# Altium PCB PCB Rev 2.PcbDoc
Units mil, origin at the board's own origin, x right, y up, seen from the top; angles counter-clockwise.
Board outline 1692.91 x 1736.22 mil, 4 copper layers (TOP SIGNAL, POWER, GND, BOTTOM SIGNAL), stack 23.756 mil thick; 62 components, 41 nets, 249 pads, 43 vias.
Unrouted connection lines stored in the file: 19.
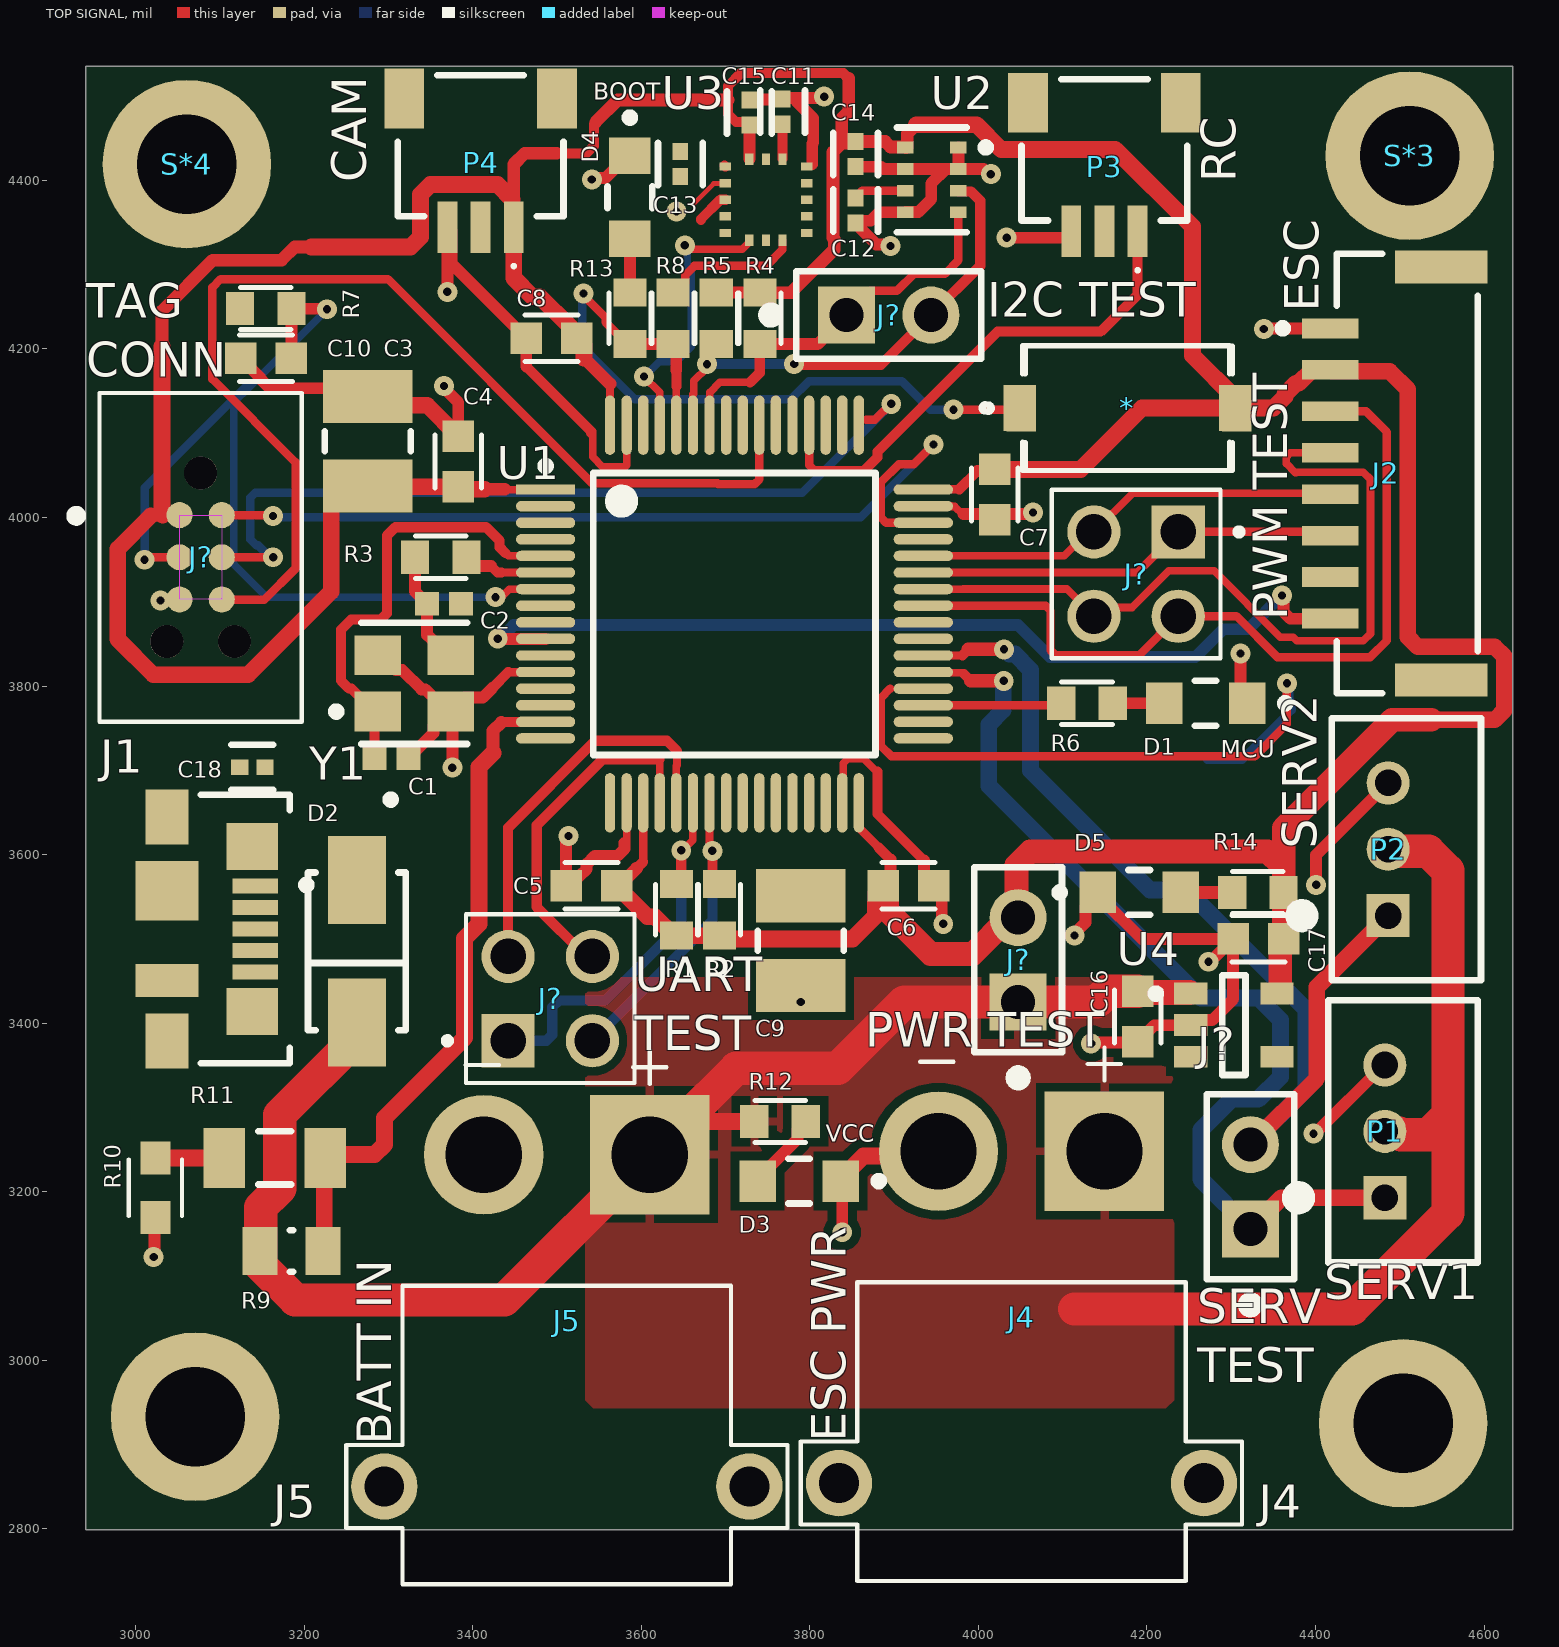
[diagram p0: TOP SIGNAL view]
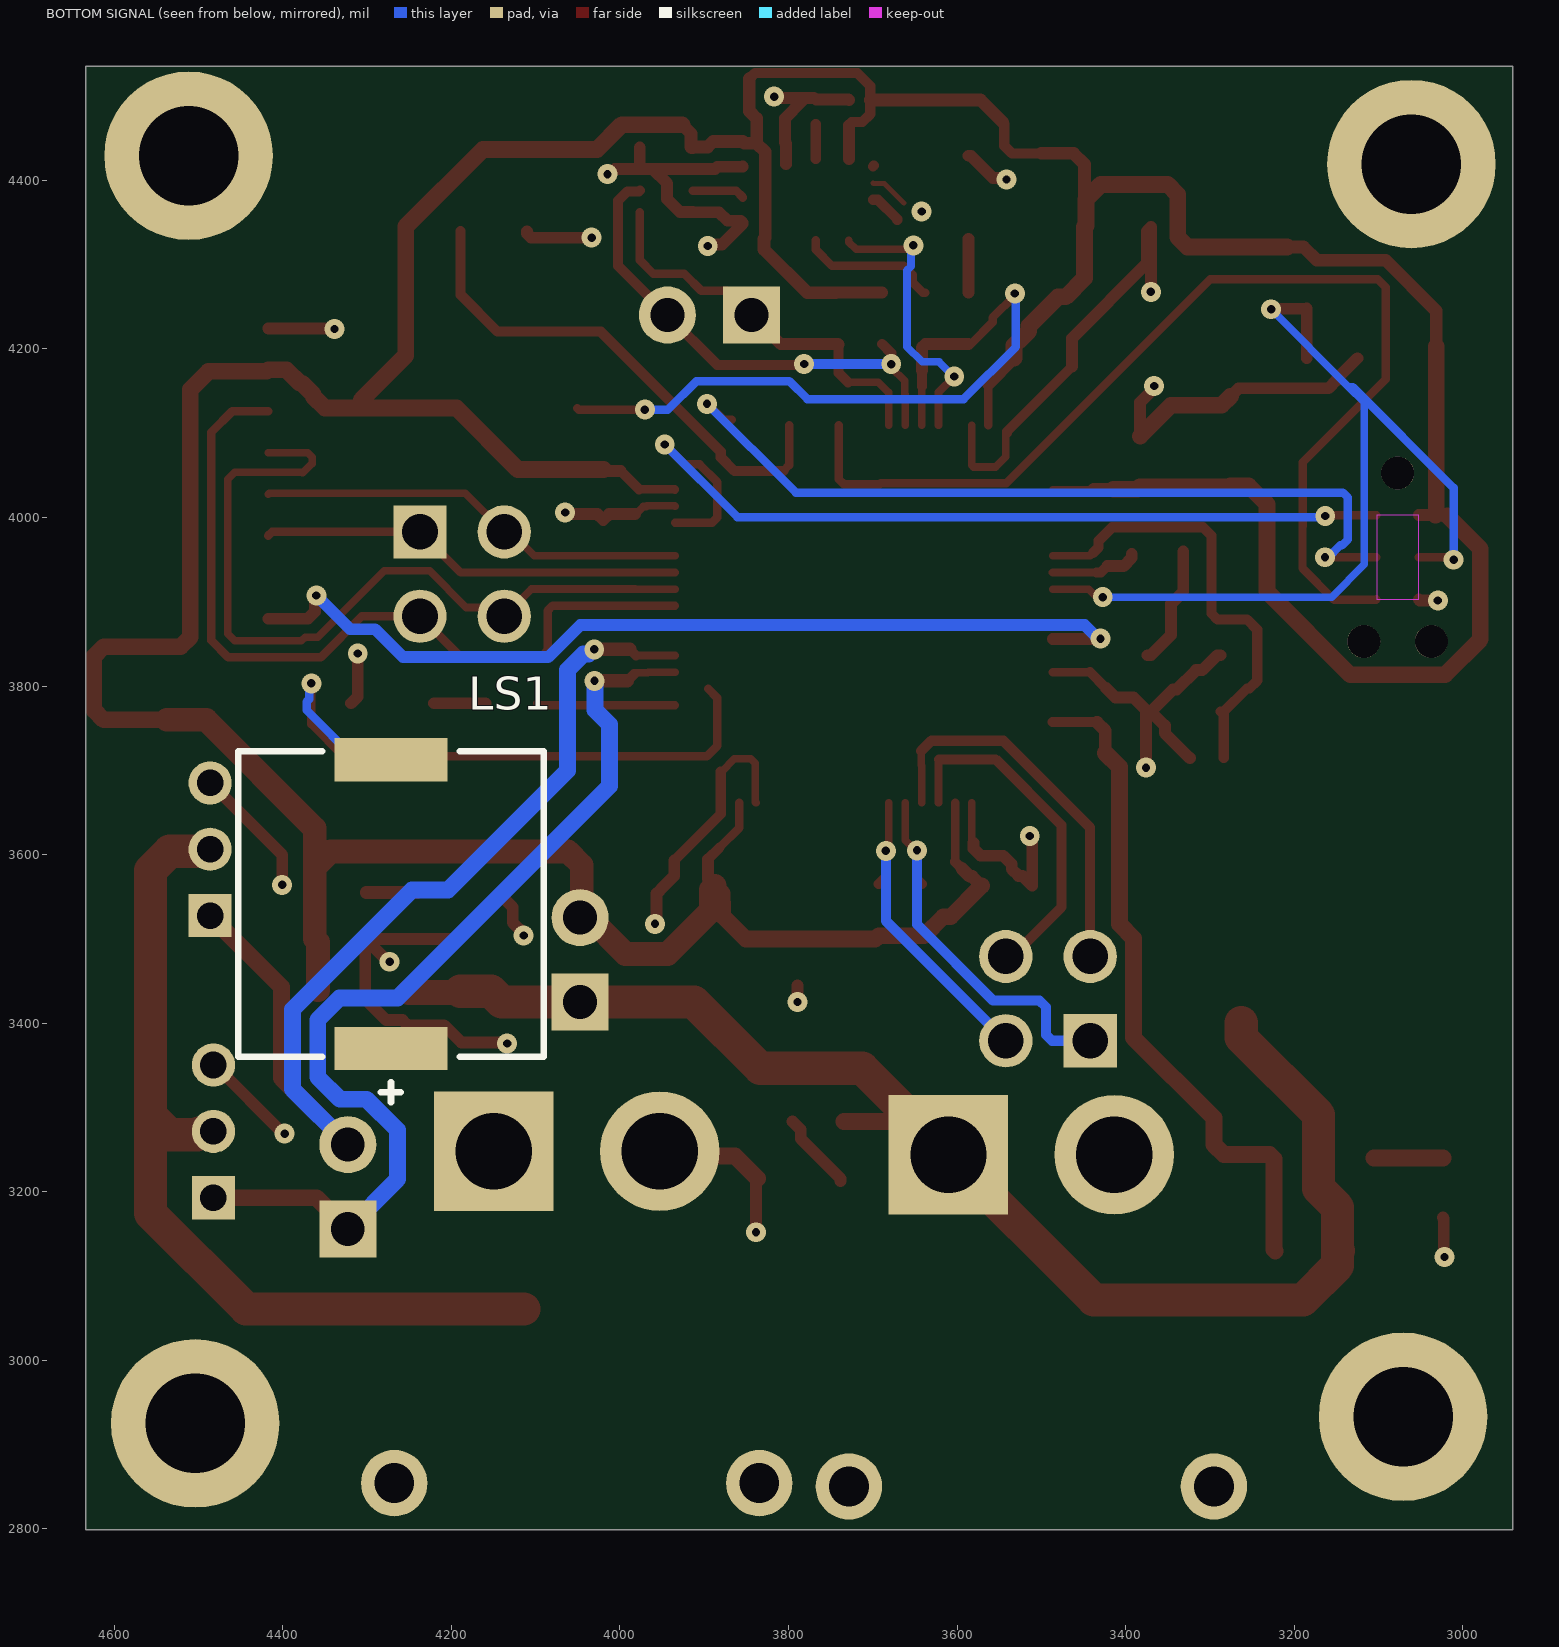
[diagram p1: BOTTOM SIGNAL view, seen from below]
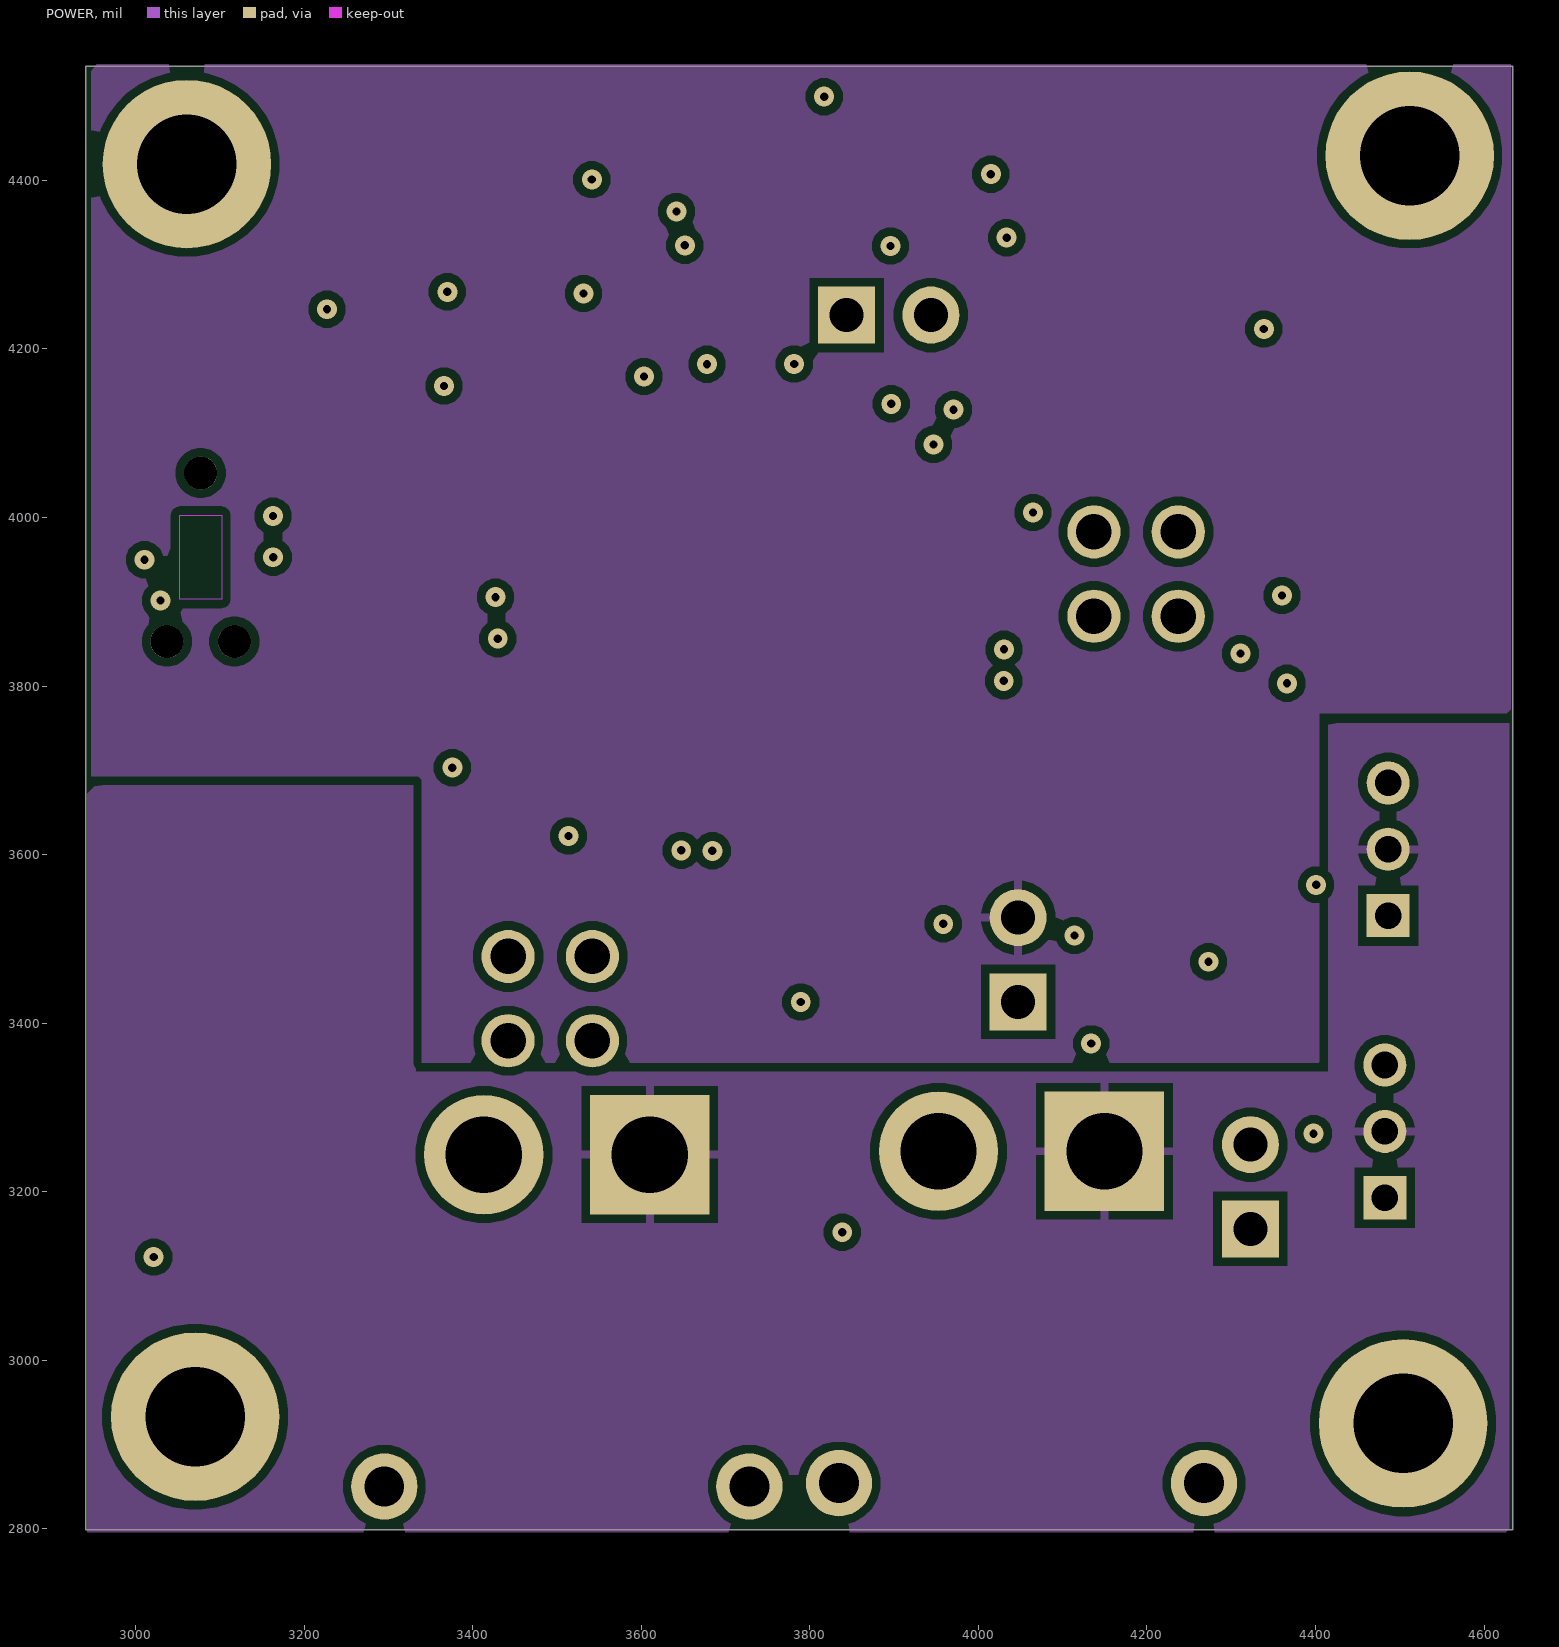
[diagram p2: POWER]
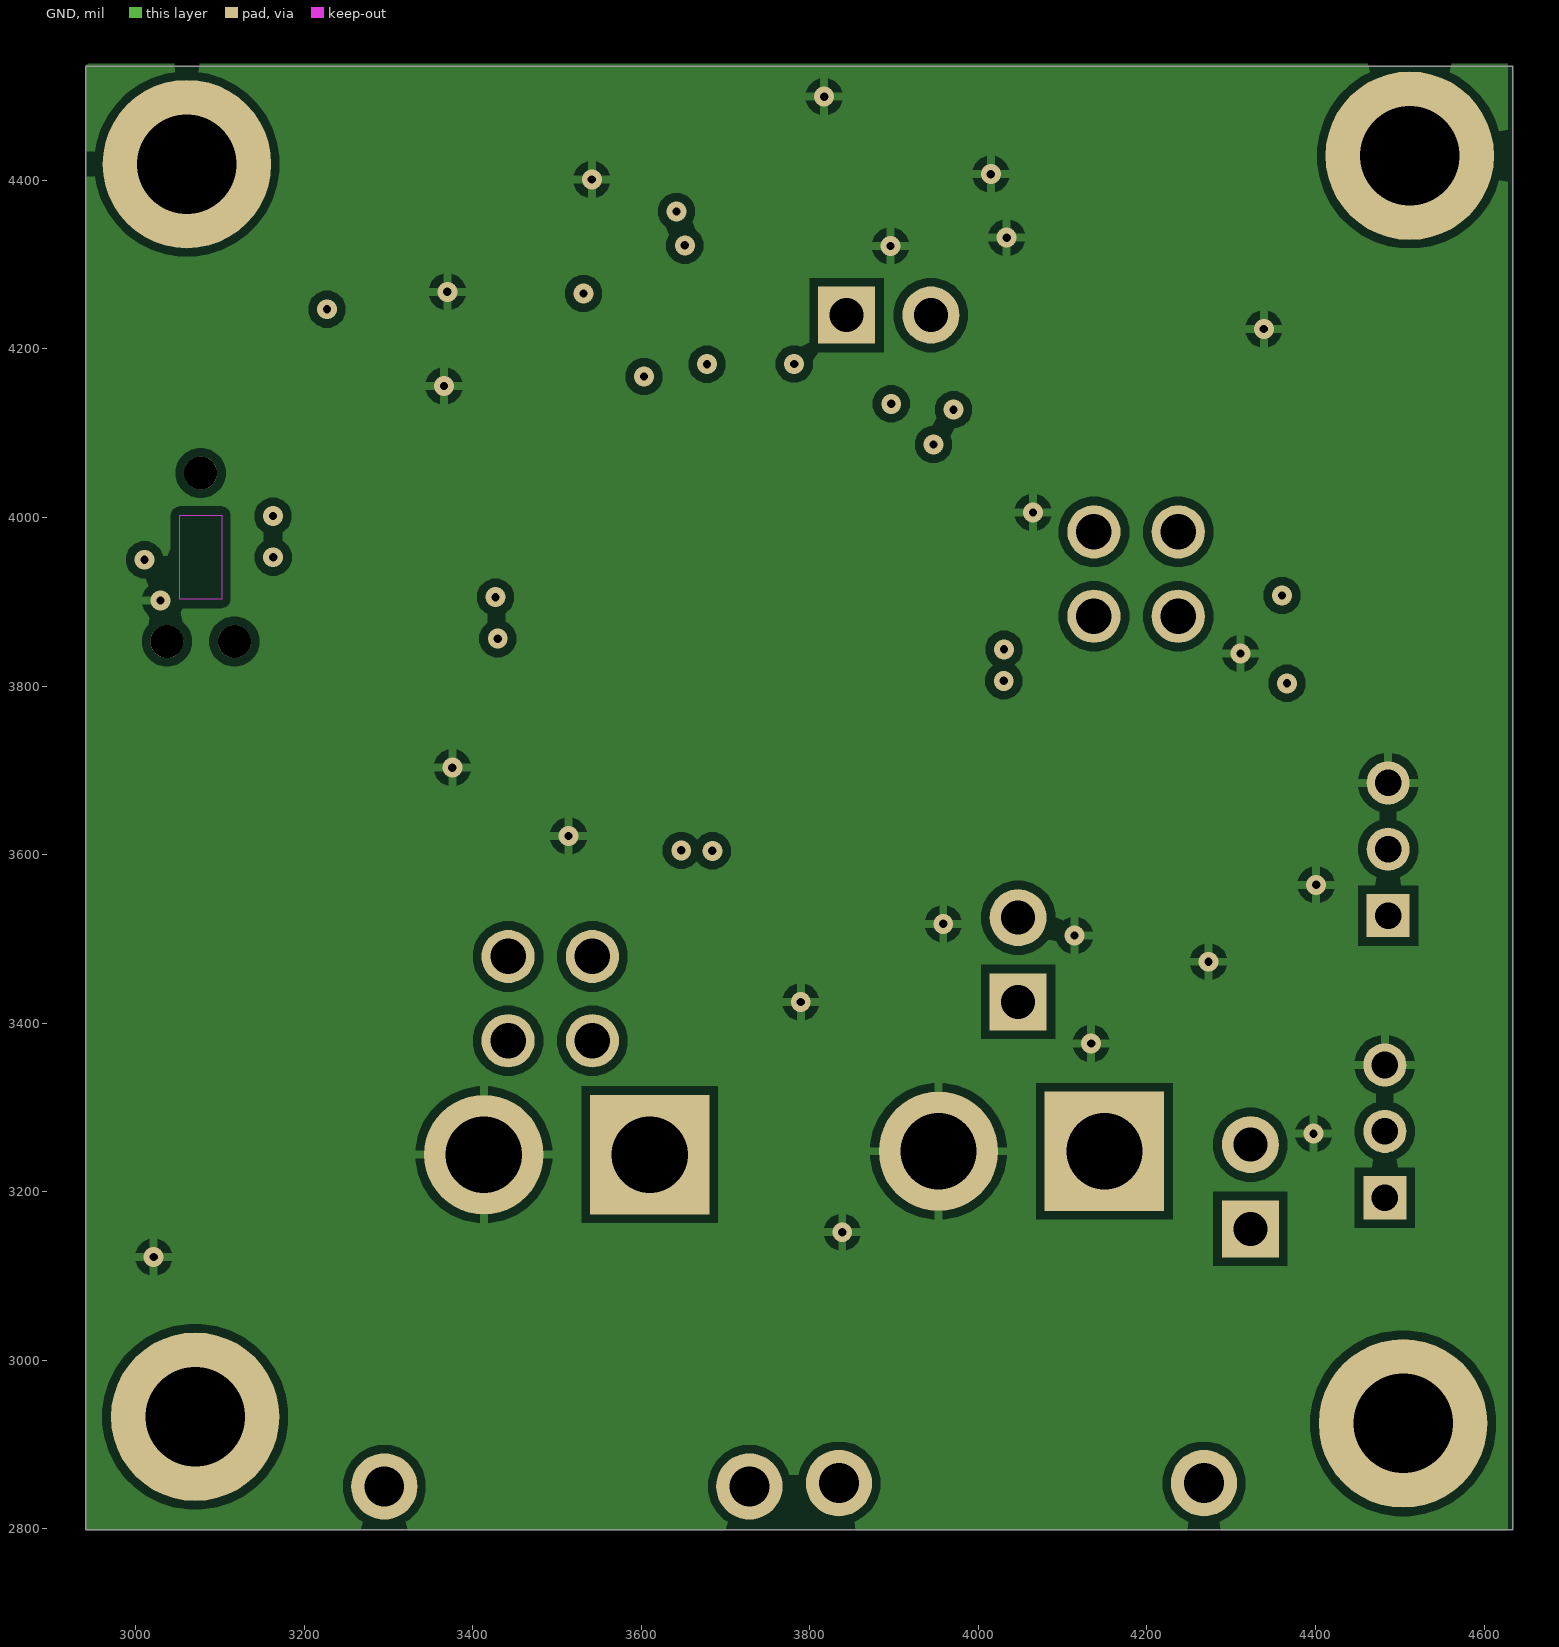
[diagram p3: GND]

## Layer stack, top to bottom
Top Solder: solder mask 0.4, Solder Resist, Dk 3.5
TOP SIGNAL: signal copper 1.4
Dielectric 2: prepreg 2.8, PP-006, Dk 4.1
POWER: signal copper 1.378
Dielectric 1: dielectric 12.6, FR-4, Dk 4.8
GND: signal copper 1.378
Dielectric 3: prepreg 2.8, PP-006, Dk 4.1
BOTTOM SIGNAL: signal copper 1.4
Bottom Solder: solder mask 0.4, Solder Resist, Dk 3.5

## Board outline
2940.94,4535.43 4633.86,4535.43 4633.86,2799.21 2940.94,2799.21

## Design rules (kind name [scope] priority, off if disabled: settings)
Clearance Clearance_1 [(ExistsOnLayer('POWER') Or ExistsOnLayer('GND')) vs (ExistsOnLayer('POWER') Or ExistsOnLayer('GND'))] p1: gap=10 ignorepadtopadclearanceinfootprint=FALSE sourcerule=37 cellrowname=All cellrowtype=0 cellcolname=All cellcoltype=0 innerlayers=TRUE
Clearance Clearance_2 [(ExistsOnLayer('TOP SIGNAL') Or ExistsOnLayer('BOTTOM SIGNAL')) vs (ExistsOnLayer('TOP SIGNAL') Or ExistsOnLayer('BOTTOM SIGNAL'))] p2: gap=10 ignorepadtopadclearanceinfootprint=FALSE sourcerule=37 cellrowname=All cellrowtype=0 cellcolname=All cellcoltype=0 outerlayers=TRUE
Clearance [All] p3: gap=10 ignorepadtopadclearanceinfootprint=FALSE ismatrix=TRUE
PolygonConnect [All] p1: connectstyle=Relief reliefconductorwidth=10 reliefentries=4 polygonreliefangle="90 Angle" airgapwidth=10
RoutingVias [All] p1: holewidth=28 width=50 viastyle="Through Hole" minholewidth=28 minwidth=50 maxholewidth=28 maxwidth=50
SolderMaskExpansion [All] p1: expansion=4 istentingtop=FALSE
Width MaxMinWidth_1 [All] p1: maxlimit=39.37 minlimit=10 preferedwidth=10 toplayer_minwidth=0 midlayer1_maxwidth=10 midlayer2_maxwidth=10 bottomlayer_minwidth=0 minimp=50.000000 maximp=50.000000 favimp=50.000000
Width [All] p2: maxlimit=10 minlimit=10 preferedwidth=10
30 further rules are at their usual default settings.

## Classes and differential pairs
component class Sensors: C11 C12 C13 C14 C15 U2 U3
component class Power: C16 C17 C18 D2 D3 D4 D5 J1 R9 R10 R11 R12 R13 R14 U4
component class MCU: * C1 C2 C3 C4 C5 C6 C7 C8 C9 C10 D1 LS1 R1 R2 R3 R4 R5 R6 R7 R8 S*3 S*4 U1 Y1
component class Connectors: J2 J4 J5 P1 P2 P3 P4

## Components (designator, comment, footprint, x,y, rotation, side; value= is the part's Value field where it differs from the comment)
* "PTS636 SM50J SMTR LFS" "PTS636 SM50J SMTR LFS-Footprint-1" 4460.2,5434.92 r0 top
C1 "10pF" CAPC1005X55X25ML05T05 3303.74,3714.57 r0 top
C2 "10pF" CAPC1005X55X25ML05T05 3366.14,3897.64 r0 top
C3 "10uF" CAP_1210 3275.59,4090.55 r90 top
C4 "100nF" CAP_0603 3382.87,4066.42 r90 top
C5 "100nF" CAP_0603 3540.87,3562.99 r180 top
C6 "100nF" CAP_0603 3917.32,3562.99 r0 top
C7 "100nF" CAP_0603 4019.68,4027.09 r270 top
C8 "100nF" CAP_0603 3493.62,4212.6 r180 top
C9 "2.2uF" CAP_1210 3789.37,3498.03 r270 top
C10 "100nF" CAP_0603 3155.04,4188.98 r180 top
C11 "100nF" FP-CL93-IPC_C 3767.72,4481.44 r90 top
C12 "100nF" FP-CL93-IPC_C 3854.33,4364.17 r270 top
C13 "100nF" FP-CL93-IPC_C 3646.51,4419.29 r270 top
C14 "100nF" FP-CL93-IPC_C 3854.33,4431.1 r270 top
C15 "100nF" FP-CL93-IPC_C 3728.35,4480.31 r90 top
C16 "1uF" CAP_0603 4188.98,3407.95 r270 top
C17 "1uF" CAP_0603 4332.2,3500 r180 top
C18 "100nF" FP-CL93-IPC_C 3138.64,3703.74 r180 top
D1 "LTST-C171KGKT" FP-LTST-C171KGKT-MFG 4269.69,3779.53 r180 top
D2 "SCHOTTKY_40Vrm_1A_500mV" FP-403AE-MFG 3262.8,3485.24 r270 top
D3 "LTST-C171KGKT" FP-LTST-C171KGKT-MFG 3787.4,3212.6 r180 top
D4 "LTST-C171KGKT" FP-LTST-C171KGKT-MFG 3586.61,4379.92 r270 top
D5 "LTST-C171KGKT" FP-LTST-C171KGKT-MFG 4190.95,3555.12 r0 top
J1 "473460001" FP-473460001-MFG 3051.18,3511.81 r270 top
J2 "BM08B-GHS-TBT(LF)(SN)" FP-BM08B-GHS-TBT_LF_SN-MFG 4508.86,4052.17 r90 top
J4 "XT30PW-M" AMASS_XT30PW-M 4051.18,2854.33 r180 top
J5 "XT30PW-M" AMASS_XT30PW-M 3511.81,2850.39 r180 top
J? "Harwin-M20-9990246" HARWIN_M20-9990246 4047.24,3475.2 r90 top
J? "Harwin-M20-9980245" HARWIN_M20-9980245 3492.13,3429.13 r0 top
J? "Harwin-M20-9980245" HARWIN_M20-9980245 4187.2,3932.87 r180 top
J? "TC2030-IDC-NL" TAG_TC2030-IDC-NL 3077.36,3952.76 r270 top
J? "Harwin-M20-9990246" HARWIN_M20-9990246 3893.7,4240.16 r0 top
J? "Harwin-M20-9990246" HARWIN_M20-9990246 4322.83,3205.91 r90 top
LS1 "PKMCS0909E4000-R1" FP-PKMCS-MFG 4271.65,3541.34 r270 bottom
P1 "B3B-PH-K-S(LF)(SN)" JST-B3B-PH-K-S-3_V 4503.94,3271.65 r90 top
P2 "B3B-PH-K-S(LF)(SN)" JST-B3B-PH-K-S-3_V 4507.87,3606.3 r90 top
P3 "SM03B-SRSS-TB(LF)(SN)" JST-SM03B-SRSS-TB_V 4149.61,4436.02 r180 top
P4 "SM03B-SRSS-TB(LF)(SN)" JST-SM03B-SRSS-TB_V 3409.45,4440.94 r180 top
R1 "10k" RES_0603 3641.73,3534.45 r270 top value=10kR
R2 "10k" RES_0603 3692.91,3534.45 r270 top value=10kR
R3 "0R" RES_0603 3362.2,3952.76 r180 top
R4 "4.7K" RES_0603 3741.14,4236.22 r90 top
R5 "4.7K" RES_0603 3688.98,4236.22 r90 top
R6 "1k" RES_0603 4128.94,3779.53 r0 top value=1kR
R7 "10k" RES_0603 3154.53,4248.03 r180 top value=10kR
R8 "10k" RES_0603 3637.8,4236.22 r270 top value=10kR
R9 "5K" RESC2013X83X38NL15T13 3185.04,3129.92 r0 top
R10 "" RNCF0603_MFG 3023.62,3204.72 r90 top
R11 "3K" RESC3116X65X40ML10T20 3165.35,3240.16 r0 top
R12 "RES_2.2k_1%_0.1W_0603" RES_0603 3764.76,3283.46 r0 top value=2.2kR
R13 "RES_1k_1%_0.1W_0603" RES_0603 3586.61,4236.22 r90 top value=1kR
R14 "RES_1k_1%_0.1W_0603" RES_0603 4331.69,3555.12 r180 top value=1kR
S*1 "M3_HOLE" "M3 Screw Hole Footprint" 3070.87,2933.07 r0 top
S*2 "M3_HOLE" "M3 Screw Hole Footprint" 4503.94,2925.2 r0 top
S*3 "M3_HOLE" "M3 Screw Hole Footprint" 4511.81,4429.13 r0 top
S*4 "M3_HOLE" "M3 Screw Hole Footprint" 3061.02,4419.29 r0 top
U1 "STM32F722RET6" FP-LQFP64-5W-IPC_A 3710.63,3885.48 r0 top
U2 "BMP280" FP-BMP280-MFG 3944.88,4400.59 r0 top
U3 "ICM-20602" INSE-I62-16 3748.03,4376.97 r0 top
U4 "MIC5504-3.3YM5-TR" FP-SOT23-5LD-PL-1-MFG 4303.15,3397.64 r0 top
Y1 "ABM8G-16.000MHZ-18-D2Y-T" FP-ABM8G-MFG 3330.71,3803.15 r0 top

## Footprints (in the part's own frame and the unit in brackets; to place one, negate y for a bottom-side part, rotate by r counter-clockwise, add the part's x,y. Pads: shape width x height; smd on the part's side, far side on the other; paste and mask are expansions set on the pad)
AMASS_XT30PW-M [mm]
  rect 3.6x3.6 hole 2.3: 1(-2.5,-10)
  round 3.6 hole 2.3: 2(2.5,-10)
  round 2 hole 1.2: ""(-5.5,0) ""(5.5,0)
  silkscreen extent -6.65,-13.13 6.65,2.95, body extent -6.65,-11 6.65,2.95, height 5
CAP_0603 [mm] "Chip Capacitor, 2-Leads, Body 1.60x0.80mm, IPC Medium Density"
  rect 0.95x0.95 smd mask+0.05: 1(-0.762,0) 2(0.762,0)
  silkscreen extent -0.8,-0.7 0.8,0.7, body extent -0.85,-0.45 0.85,0.45, height 0.9
CAP_1210 [mm] "Chip Capacitor, 2-Leads, Body 3.25x2.50mm, IPC Medium Density"
  rect 1.6x2.7 smd: 1(-1.35,0) 2(1.35,0)
  silkscreen extent -0.3,-1.3 0.3,1.3, body extent -1.6,-1.35 1.6,1.35, height 2.49
CAPC1005X55X25ML05T05 [mm] "Chip Capacitor, 2-Leads, Body 1.00x0.50mm, IPC Low Density"
  rect 0.72x0.72 smd: 1(-0.51,0) 2(0.51,0)
  body extent -0.53,-0.28 0.53,0.27, height 0.55
FP-403AE-MFG [mm]
  rect 2.65x1.75 smd paste+0 mask+0: 1(-2.15,0) 2(2.15,0)
  silkscreen extent -4.7,-1.48 2.37,1.48, body extent -3.57,-1.58 3.57,1.58, height 0.25
FP-473460001-MFG [mm]
  rect 0.45x1.38 smd paste+0 mask+0: 1(-1.3,2.31) 2(-0.65,2.31) 3(0,2.31) 4(0.65,2.31) 5(1.3,2.31)
  rect 1.425x1.55 smd paste+0 mask+0: 6(-2.488,2.225) 7(2.488,2.225)
  rect 1.65x1.3 smd paste+0 mask+0: 8(-3.375,-0.35) 11(3.375,-0.35)
  rect 1.8x1.9 smd paste+0 mask+0: 9(-1.15,-0.35)
  rect 1x1.9 smd paste+0 mask+0: 10(1.55,-0.35)
  silkscreen extent -4.05,0.67 4.05,3.98, body extent -4.3,-2.48 4.3,3.45, height 0.25
FP-ABM8G-MFG [mm]
  rect 1.4x1.2 smd paste+0 mask+0: 1(-1.1,-0.85) 2(1.1,-0.85) 3(1.1,0.85) 4(-1.1,0.85)
  silkscreen extent -2.47,-1.83 1.6,1.83, body extent -1.9,-1.55 1.9,1.55, height 0.25
FP-BM08B-GHS-TBT_LF_SN-MFG [mm]
  rect 0.6x1.7 smd paste+0 mask+0: 1(4.375,2.325) 2(3.125,2.325) 3(1.875,2.325) 4(0.625,2.325) 5(-0.625,2.325) 6(-1.875,2.325) 7(-3.125,2.325) 8(-4.375,2.325)
  rect 1x2.8 smd paste+0 mask+0: 9(-6.225,-1.025) 10(6.225,-1.025)
  silkscreen extent -6.63,-2.12 6.63,3.87, body extent -6.83,-2.52 6.83,3.27, height 0.25
FP-BMP280-MFG [mm]
  rect 0.5x0.35 smd paste+0 mask+0: 1(0.8,0.975) 2(0.8,0.325) 3(0.8,-0.325) 4(0.8,-0.975) 5(-0.8,-0.975) 6(-0.8,-0.325) 7(-0.8,0.325) 8(-0.8,0.975)
  silkscreen extent -1.05,-1.58 1.75,1.58, body extent -1.55,-1.8 1.55,1.8, height 0.25
FP-CL93-IPC_C [mil]
  rect 20.29x18.6 smd paste+0 mask+0: 1(-14.9,0) 2(14.9,0)
  silkscreen extent -25,-27 25,27, body extent -29,-15 29,15, height 10
FP-LQFP64-5W-IPC_A [mm]
  rect 1.788x0.312 smd paste+0 mask+0: 1(-5.691,3.75)
  rrect100% 1.788x0.312 smd paste+0 mask+0: 2(-5.691,3.25) 3(-5.691,2.75) 4(-5.691,2.25) 5(-5.691,1.75) 6(-5.691,1.25) 7(-5.691,0.75) 8(-5.691,0.25) 9(-5.691,-0.25) 10(-5.691,-0.75) 11(-5.691,-1.25) 12(-5.691,-1.75) 13(-5.691,-2.25) 14(-5.691,-2.75) 15(-5.691,-3.25) 16(-5.691,-3.75) 33(5.691,-3.75) 34(5.691,-3.25) 35(5.691,-2.75) 36(5.691,-2.25) 37(5.691,-1.75) 38(5.691,-1.25) 39(5.691,-0.75) 40(5.691,-0.25) 41(5.691,0.25) 42(5.691,0.75) 43(5.691,1.25) 44(5.691,1.75) 45(5.691,2.25) 46(5.691,2.75) 47(5.691,3.25) 48(5.691,3.75)
  rrect100% 0.312x1.788 smd paste+0 mask+0: 17(-3.75,-5.691) 18(-3.25,-5.691) 19(-2.75,-5.691) 20(-2.25,-5.691) 21(-1.75,-5.691) 22(-1.25,-5.691) 23(-0.75,-5.691) 24(-0.25,-5.691) 25(0.25,-5.691) 26(0.75,-5.691) 27(1.25,-5.691) 28(1.75,-5.691) 29(2.25,-5.691) 30(2.75,-5.691) 31(3.25,-5.691) 32(3.75,-5.691) 49(3.75,5.691) 50(3.25,5.691) 51(2.75,5.691) 52(2.25,5.691) 53(1.75,5.691) 54(1.25,5.691) 55(0.75,5.691) 56(0.25,5.691) 57(-0.25,5.691) 58(-0.75,5.691) 59(-1.25,5.691) 60(-1.75,5.691) 61(-2.25,5.691) 62(-2.75,5.691) 63(-3.25,5.691) 64(-3.75,5.691)
  silkscreen extent -5.82,-4.25 4.25,4.58, body extent -7.09,-7.09 7.09,7.09, height 0.25
FP-LTST-C171KGKT-MFG [mm]
  rect 1.1x1.25 smd paste+0 mask+0: 1(-1.25,0) 2(1.25,0)
  silkscreen extent -2.53,-0.67 0.33,0.67, body extent -1.9,-0.77 1.9,0.77, height 0.25
FP-PKMCS-MFG [mm]
  rect 1.3x3.4 smd paste+0 mask+0: 1(-4.35,0) 2(4.35,0)
  silkscreen extent -4.6,-4.6 5.97,4.6, body extent -4.5,-4.5 4.5,4.5, height 1.9
FP-SOT23-5LD-PL-1-MFG [mm]
  rect 1x0.66 smd paste+0 mask+0: 1(-1.3,0.95) 2(-1.3,0) 3(-1.3,-0.95) 4(1.3,-0.95) 5(1.3,0.95)
  silkscreen extent -2.47,-1.5 0.35,1.5, body extent -1.9,-1.6 1.9,1.6, height 0.25
HARWIN_M20-9980245 [mm]
  rect 1.605x1.605 / inner round 1.605 / far side rect 1.605x1.605 hole 1.07: 1(-1.27,-1.27)
  round 1.605 hole 1.07: 2(-1.27,1.27) 3(1.27,-1.27) 4(1.27,1.27)
  silkscreen extent -3.2,-2.54 2.54,2.54, body extent -2.54,-2.54 2.54,2.54, height 8.65
HARWIN_M20-9990246 [mm]
  rect 1.72x1.72 hole 1.02 paste-2539.97 mask+0: 1(-1.27,0)
  round 1.72 hole 1.02 paste-2539.97 mask+0: 2(1.27,0)
  silkscreen extent -3.81,-1.32 2.79,1.32, body extent -2.89,-1.42 2.89,1.42, height 0.25
INSE-I62-16 [mm] "LGA, 16-Leads, Body 3x3mm, Pitch 0.5mm"
  rect 0.35x0.25 smd: 1(-1.225,1) 2(-1.225,0.5) 3(-1.225,0) 4(-1.225,-0.5) 5(-1.225,-1) 9(1.225,-1) 10(1.225,-0.5) 11(1.225,0) 12(1.225,0.5) 13(1.225,1)
  rect 0.25x0.35 smd: 6(-0.5,-1.225) 7(0,-1.225) 8(0.5,-1.225) 14(0.5,1.225) 15(0,1.225) 16(-0.5,1.225)
  body extent -1.5,-1.5 1.5,1.5, height 0.8
JST-B3B-PH-K-S-3_V [mm] "Connector, 3-Leads, Body 7.9x4.5mm, Pitch 2mm"
  rect 1.3x1.3 hole 0.8: 1(-2,0.55)
  round 1.3 hole 0.8: 2(0,0.55) 3(2,0.55)
  silkscreen extent -3.95,-2.25 3.95,3.4, body extent -3.95,-2.25 3.95,2.25, height 6
JST-SM03B-SRSS-TB_V [mm] "SMD, 3-Leads, Body 5x4.25mm, Pitch 1mm"
  rect 0.6x1.55 smd: 1(-1,2.45) 2(0,2.45) 3(1,2.45)
  rect 1.2x1.8 smd: MP1(-2.3,-1.425) MP2(2.3,-1.425)
  silkscreen extent -2.5,-2.12 2.5,3.67, body extent -2.5,-2.12 2.5,2.83, height 3.25
"M3 Screw Hole Footprint" [mm]
  round 5.08 hole 3: 0(0,0)
"PTS636 SM50J SMTR LFS-Footprint-1" [mil]
  rect 35x55 smd paste+0 mask+0: 1(-412.95,-1305) 1(-409.49,-1305.25) 2(-157.05,-1305) 2(-153.58,-1305.25)
  silkscreen extent -457,-1379 -159,-1231, body extent -403,-1374 -164,-1236, height 169
RES_0603 [mm] "Chip Resistor, 2-Leads, Body 1.60x0.80mm, IPC Medium Density"
  rect 0.85x1 smd mask+0.05: 1(-0.775,0) 2(0.775,0)
  silkscreen extent -0.76,-0.64 0.76,0.64, body extent -0.8,-0.4 0.8,0.4, height 0.53
RESC2013X83X38NL15T13 [mm] "Chip Resistor, 2-Leads, Body 2.03x1.27mm, IPC Medium Density"
  rect 1.05x1.45 smd: 1(-0.95,0) 2(0.95,0)
  silkscreen extent -0.05,-0.63 0.05,0.63, body extent -1.09,-0.71 1.09,0.71, height 0.83
RESC3116X65X40ML10T20 [mm] "Chip Resistor, 2-Leads, Body 3.10x1.60mm, IPC Low Density"
  rect 1.25x1.8 smd: 1(-1.525,0) 2(1.525,0)
  silkscreen extent -0.5,-0.8 0.5,0.8, body extent -1.6,-0.85 1.6,0.85, height 0.65
RNCF0603_MFG [mm] "Recommended Land Pattern"
  rect 1x0.9 smd: 1(-0.9,0) 2(0.9,0)
  silkscreen extent -0.85,-0.8 0.85,0.8, body extent -0.77,-0.4 0.77,0.4, height 0.55
TAG_TC2030-IDC-NL [mil]
  round 30.98 smd paste-39.37: 1(-50,-25) 2(-50,25) 3(0,-25) 4(0,25) 5(50,-25) 6(50,25)
  round 39.02 hole 39.02 unplated: ""(-100,0) ""(100,40) ""(100,-40)
  Keep-Out Layer region: 50,-25.03 -50.06,-25.03 -50.06,25 50,25
  silkscreen extent -195,-154 195,120

## Part data
*: library part CMP-00098-1, "Switch Tactile N.O. SPST Rectangular Button J-Bend 0.05A 12VDC 1.77N SMD T/R", Color=Black, Contact Resistance=100mΩ, Insulation Resistance=100MΩ, Max Current Rating=50mA, Max Operating Temperature=90°C, Max Voltage Rating (DC)=12V, Min Operating Temperature=-40°C, Operating Force=2.26N, Electrical Life=50kcycles, Height=3.25mm, Length=6mm, Lifecycle Status=Production, Number of Positions=1, REACH SVHC=Yes, RoHS=Compliant, Sealable=IP40, Throw Configuration=SPST
C1 C2: library part CMP-2100-03589-1, "Chip Capacitor, 10 pF, +/- 5%, 50 V, -55 to 125 degC, 0402 (1005 Metric), RoHS, Tape and Reel", Case Code (Imperial)=0402, Case Code (Metric)=1005, Dielectric=C0G, Dielectric Material=Ceramic, Insulation Resistance=100GR, Manufacturer=Yageo, Max Operating Temperature=125degC, Min Operating Temperature=-55degC, Package Description="2-Pin Surface Mount Device, Body 1 x 0.5 mm", Package Quantity=1, Temperature Coefficient=30ppm/degC, Tolerance=5%, Voltage=50V, Capacitance=10pF, Case/Package=0402, Composition=Ceramic, Datasheet URL=http://www.yageo.com/documents/recent/UPY-GP_NP0_16V-to-50V_14.pdf, Datasheet Version="Rev. 14, 07/2016", Depth=0.5mm, Height=0.5mm, Lead Free=LeadFree, Length=1mm, Manufacturer URL=http://www.yageo.com/, Mount=SurfaceMount, Number of Pins=2, Package Reference=0402, Packaging=TapeandReel, Radiation Hardening=No, REACH SVHC=NoSVHC, RoHSCompliant=True, Termination=SMD/SMT, Thickness=0.022inch, Voltage Rating=50V, Voltage Rating (DC)=50V, Width=0.02inch
C3: library part CMP-097-000018-7, "10 µF ±10% 100V Ceramic Capacitor X7S 1210 (3225 Metric)", JLCPCB Part No.=C5596909
C4 C5 C6 C7 C8 C10: library part CMP-097-000004-12, "CAP CER 0.1UF 50V X7R 0603", Capacitor Type=Ceramic, Case/Package=0603, JLCPCB Part No.=C14663, Max Operating Temperature=125°C, Min Operating Temperature=-55°C, Package Shape=Rectangular, Package Style=SMTMeter, Rated DC Voltage (URdc)=50V, Temperature Characteristics Code=X7R, Tolerance  (fill in as +-)=10%, Dielectric Material=Ceramic, Height=0.8mm, JESD-609 Code=e3, Length=1.6mm, Mounting Technology="Surface Mount", Multilayer=Yes, Packaging="Tape and Reel", Pins=2, Reach SVHC Compliant=Yes, RoHS Compliant=Yes, Terminal Finish=Nickel, Termination=Wraparound, Tolerance (fill in as +-)=10%, Width=0.8mm
C9: library part CMP-097-000020-5, "2.2 µF ±10% 100V Ceramic Capacitor X7R 1210 (3225 Metric)", JLCPCB Part No.=C55151
C11 C12 C13 C14 C15 C18: library part CMP-13271-000610-1, "Cap Ceramic 100nF 10V X7R ±10% SMD 0402 +125°C Paper T/R"
C16 C17: library part CMP-097-000006-8, "CAP CER 1UF 50V X5R 0603", Capacitor Type=Ceramic, Case/Package=0603, JLCPCB Part No.=C15849, Max Operating Temperature=85°C, Min Operating Temperature=-55°C, Package Shape=Rectangular, Package Style=SMTMeter, Rated DC Voltage (URdc)=50V, Temperature Characteristics Code=X5R, Tolerance  (fill in as +-)=10%, Dielectric Material=Ceramic, Height=0.9mm, JESD-609 Code=e3, Length=1.6mm, Mounting Technology="Surface Mount", Multilayer=Yes, Packaging="Tape and Reel", Pins=2, Reach SVHC Compliant=Yes, RoHS Compliant=Yes, Terminal Finish=Nickel, Termination=Wraparound, Tolerance (fill in as +-)=10%, Width=0.8mm
D1 D3 D4 D5: library part CMP-22017-000037-1, "LED GREEN CLEAR SMD", Case Code (Imperial)=0805, Case Code (Metric)=2012, Color=Green, Forward Current=30mA, Forward Voltage=2.4V, Lens Color=Colorless, Max Operating Temperature=85°C, Min Operating Temperature=-55°C, Package Quantity=1, Power Dissipation=75mW, Reverse Voltage=5V, Test Current=20mA, Case/Package=0805, Depth=1.25mm, Dominant Wavelength=571nm, Height=0.8mm, Illumination Color=Green, Lead Free="Lead Free", Length=2mm, Lens Style=Rectangular, Lens Transparency=Clear, Luminous Intensity=35mcd, Mount="Surface Mount", Number of Elements=1, Number of LEDs=1, Number of Pins=2, Packaging="Tape and Reel", Power Rating=75mW, Radiation Hardening=No, Viewing Angle=130°, Wavelength=574nm, Width=1.25mm
D2: library part CMP-00074-2, "SS14 Series 500 mV 1 A 40 V Max Reverse Voltage Schottky Rectifier - DO-214AC", JLCPCB Part No.=C2480
J1: library part CMP-2000-05246-2, "CONN RCPT USB2.0 MICRO B SMD R/A", Current Rating=1.8A, Manufacturer=Molex, Package=0, Temperature="-30°C to +85°C", Temperature Range High=+85°C, Temperature Range Low=-30°C, Voltage Rating=30V, Automotive=No, Category=Conn, ComponentLink2Description=Datasheet, ComponentLink2URL=https://www.molex.com/webdocs/datasheets/pdf/en-us/0473460001_IO_CONNECTORS.pdf, Conn Orientation="Right Angle", Contact Material=Gold,Nickel, Device Class L1=Connectors, Device Class L2="USB Connectors", Device Class L3=unset, Digikey Description="CONN RCPT USB2.0 MICRO B SMD R/A", Footprint Url=https://www.molex.com/pdm_docs/sd/473460001_sd.pdf, Height=2.945mm, Is Female=yes, Lead Free=Yes, Manufacturer Part Number=473460001, Number of Contacts=5, Octopart=https://octopart.com/47346-0001-molex-7164928, Pitch=0.65mm, RoHS=TRUE, Shielding=true, Usb Standard="USB 2.0"
J2: library part CMP-17439-000100-2, "CONN HEADER SMD 8POS 1.25MM", Case/Package=SMD/SMT, Current Rating=1A, Housing Color=Natural, Max Operating Temperature=85°C, Min Operating Temperature=-25°C, Voltage Rating=50V, Contact Material="Copper, Tin", Contact Plating=Tin, Height=4.2mm, Housing Material=Nylon, Lead Free="Lead Free", Lead Pitch=1.25mm, NexarPartId=289283, Number of Contacts=8, Number of Positions=8, Number of Rows=1, Orientation=Straight, Packaging="Cut Tape", Pitch=1.25mm, REACH SVHC="No SVHC", RoHS=Compliant, Termination=SMD/SMT, Voltage Rating (AC)=50V, Wire/Cable Gauge=26AWG
J4 J5: library part CMP-00055-6, "Power Connector", JLCPCB Part No.=C428721, Package=None, Availability="Not in stock", Check_prices=https://www.snapeda.com/parts/XT30UPB-M/AMASS/view-part/?ref=eda, Component Type=Standard, Design Item ID=XT30UPB-M, MF=amass, MP=XT30UPB-M, Pin Count=2, Price=None, SnapEDA_Link=https://www.snapeda.com/parts/XT30UPB-M/AMASS/view-part/?ref=snap, Source=XT30UPB-M.SchLib
J? J? J?: library part CMP-00000-10, "Connector Header Through Hole 2 position 0.100\" (2.54mm)", Case/Package=SIL, Color=Black, Contact Resistance=30mR, Current Rating=3A, Insulation Resistance=10GR, JLCPCB Part No.=C3332353, Max Operating Temperature=105°C, Min Operating Temperature=-40°C, Package Quantity=1000, Voltage Rating (AC)=750V, Contact Material=Bronze,Brass, Contact Mating Length=0.24inch, Contact Plating=Tin, Contact Type="Male Pin", Depth=2.54mm, Gender=Male, Housing Color=Black, Housing Material=Nylon, Length=5.08mm, Max Current Rating=3A, Mount="Through Hole", Number of Contacts=2, Number of Positions=2, Number of Rows=1, Orientation=Straight, Packaging=Bulk, Pitch=2.54mm, Radiation Hardening=No, Reach SVHC Compliant=No, Series=M20, Termination=Solder
J? J?: library part CMP-031-000001-6, "Connector Header Through Hole 4 position 0.100\" (2.54mm)", Flammability Rating="UL94 V-0", JLCPCB Part No.=C6585845, Package=None, Availability=Unavailable, Component Type=Standard, Connector Type="BOARD CONNECTOR", Contact Finish - Mating=GOLD, Contact Finish - Termination="Gold (Au)", Contact Gender=Male, Contact Material=Brass, Design Item ID=M20-9980245, DIN Conformance=No, Filter Feature=No, IEC Conformance=No, JESD-609 Code=e4, MIL Conformance=No, Mixed Contacts=No, Mounting Style=STRAIGHT, Mounting Technology=Board, MP=M20-9980245, Number of Contacts=4, Number of Rows Loaded=1, Option="General Purpose", Pin Count=4, Price=None, Reach SVHC Compliant=Yes, RoHS Compliant=Yes, Source=M20-9980245.SchLib, Terminal Pitch=2.54mm, Termination=Solder
J?: library part CMP-257-000000-1, "CABLE ADAPTER 6 POS", Package=None, Availability=Unavailable, Component Type=Standard, Design Item ID=TC2030-IDC-NL, MP=TC2030-IDC-NL, Pin Count=6, Price=None, Source=TC2030-IDC-NL.SchLib
LS1: library part CMP-2000-05252-2, "AUDIO PIEZO TRANSDUCER 12.5V SMD", Frequency=4kHz, Max Operating Temperature=85°C, Max Supply Voltage (DC)=12.5V, Min Operating Temperature=-40°C, Min Supply Voltage (DC)=-12.5V, Package Quantity=2000, Voltage Rating=1.5V, Depth=9mm, Height=1.9mm, Lead Free="Lead Free", Length=9mm, Mount="Surface Mount", Packaging="Tape and Reel", Radiation Hardening=No, REACH SVHC="No SVHC", Self Resonant Frequency=4kHz, Termination=Solder, Voltage Rating (DC)=12.5V, Width=9mm
P1 P2: library part CMP-2000-05164-1, "Male Header, Pitch 2 mm, 1 x 3 Position, Height 6 mm, Tail Length 3.4 mm, -25 to 85 degC, RoHS, Bulk", Manufacturer=JST, Datasheet URL=https://datasheet.ciiva.com/11746/0900766b80826550-11746939.pdf, Datasheet Version=Oct-06, Manufacturer URL=http://www.jst.com/home2.html, No of Positions=3, Pitch=2mm, Style/Orientation=StraightHeader/Plug, Termination=Crimp, Type=ShroudedHeader
P3 P4: library part CMP-2000-07077-1, "Male Header, Pitch 1 mm, 1 x 3 Position, Height 2.9 mm, -25 to 85 degC, RoHS, Tape and Reel", Manufacturer=JST, Package Description="Male Header, Pitch 1 mm, 1 x 3 Position, Height 2.9 mm", Package Reference=SM03B-SRSS-TB, Datasheet URL=https://datasheet.ciiva.com/26894/getdatasheetpartid-708885-26894671.pdf, Datasheet Version=11/2010, Manufacturer URL=http://www.jst.com/home2.html, Mounting Technology=SurfaceMount, No of Positions=3, Pitch=1mm, Style/Orientation=RightAngleHeader/Plug, Termination=Crimp, Type=ShroudedHeader
R1 R2 R7 R8: library part CMP-00013-14, "10 kOhms ±1% 0.1W, 1/10W Chip Resistor 0603 (1608 Metric) Moisture Resistant Thick Film", Case/Package=0603, JLCPCB Part No.=C98220, Max Operating Temperature=155°C, Min Operating Temperature=-55°C, Package Height=0.45mm, Package Length=1.6mm, Package Shape=Rectangular, Package Style=SMTMeter, Package Width=0.8mm, Power=100mW, Rated Temperature=70°C, Resistor Type="FIXED RESISTOR", Temperature Coefficient=100ppm/°C, Tolerance=1%, Working Voltage=75V, Additional Feature="LASER TRIMMABLE", Construction=Chip, JESD-609 Code=e3, Mounting Technology="Surface Mount", Packaging="Tape and Reel", Pins=2, Reach SVHC Compliant=Yes, RoHS Compliant=Yes, Technology="METAL GLAZE/THICK FILM", Terminal Finish=Nickel, Termination=Wraparound
R3: library part CMP-027-000028-7, "0 Ohms Jumper Chip Resistor 0603 (1608 Metric) Moisture Resistant Thick Film", Case/Package=0603, JLCPCB Part No.=C95177, Max Operating Temperature=155°C, Min Operating Temperature=-55°C, Package Height=0.45mm, Package Length=1.6mm, Package Shape=Rectangular, Package Width=0.8mm, Power=100mW, Rated Temperature=70°C, Resistor Type="FIXED RESISTOR", Construction=Chip, JESD-609 Code=e3, Mounting Technology="Surface Mount", Packaging="Tape and Reel", Pins=2, Reach SVHC Compliant=Yes, RoHS Compliant=Yes, Technology="METAL GLAZE/THICK FILM", Terminal Finish=Nickel, Termination=Wraparound
R4 R5: library part CMP-00062-2, "Res Thick Film 1.6 x 0.8 mm 4.7K Ohm 1% 0.1W(1/10W) 100ppm/ C Molded SMD Paper T/R", JLCPCB Part No.=C99782
R6 R13 R14: library part CMP-019-000000-15, "1 kOhms ±1% 0.1W, 1/10W Chip Resistor 0603 (1608 Metric) Moisture Resistant Thick Film", Case/Package=0603, JLCPCB Part No.=C22548, Max Operating Temperature=155°C, Min Operating Temperature=-55°C, Package="2012 Rohm Semiconductor", Package Height=0.45mm, Package Length=1.6mm, Package Shape=Rectangular, Package Style=SMTMeter, Package Width=0.8mm, Power=100mW, Rated Temperature=70°C, Resistor Type="FIXED RESISTOR", Temperature Coefficient=100ppm/°C, Tolerance=1%, Working Voltage=75V, Additional Feature="LASER TRIMMABLE", Availability="In Stock", Check_prices=https://www.snapeda.com/parts/RC0805FR-071KL/Yageo/view-part/?ref=eda, Component Type=Standard, Construction=Chip, Design Item ID=RC0805FR-071KL, JESD-609 Code=e3, MF=Yageo, Mounting Technology="Surface Mount", MP=RC0805FR-071KL, Packaging="Tape and Reel", Pin Count=2, Pins=2, Price=None, Purchase-URL=https://pricing.snapeda.com/search/part/RC0805FR-071KL/?ref=eda, Reach SVHC Compliant=Yes, RoHS Compliant=Yes, SnapEDA_Link=https://www.snapeda.com/parts/RC0805FR-071KL/Yageo/view-part/?ref=snap, Source=RC0805FR-071KL.SchLib, Technology="METAL GLAZE/THICK FILM", Terminal Finish=Nickel, Termination=Wraparound
R9: library part CMP-2001-04320-1, Manufacturer="Vishay Dale", Part Number=PNM0805E5001BST5
R10: library part CMP-00347-47553138-1, "Res Thin Film 0603 250 Ohm 0.01% 0.1W(1/10W) ±5ppm/°C Pad SMD T/R Automotive AEC-Q200", Case Code (Imperial)=0603, Case Code (Metric)=1608, Max Operating Temperature=155°C, Max Power Dissipation=100mW, Min Operating Temperature=-55°C, Power Rating=63mW, Resistance=250Ω, Temperature Coefficient=5ppm/°C, Tolerance=0.01%, Case/Package=0603, ComponentLink1Description="Manufacturer's Website", ComponentLink1URL=http://www.seielect.com, ComponentLink2Description="Datasheet URL", ComponentLink2URL=https://www.seielect.com/catalog/sei-rncf.pdf, Composition="Thin Film", Features="Moisture Resistant", Height=558.8µm, HelpURL=https://www.seielect.com/catalog/sei-rncf.pdf, Length=1.6002mm, Mount="Surface Mount", Number of Terminations=2, RoHS=Compliant, Schedule B="8533210045, 8533210045", Width=787.4µm
R11: library part CMP-2003-03976-1, Manufacturer=Yageo, Part Number=RC1206JR-073KL
R12: library part CMP-027-000005-7, "2.2 kOhms ±1% 0.1W, 1/10W Chip Resistor 0603 (1608 Metric) Moisture Resistant Thick Film", JLCPCB Part No.=C114662
S*1 S*2 S*3 S*4: library part CMP-00045-5, "Standard sized M3 screw mounting hole"
U1: library part CMP-12105-000139-1, "IC MCU 32BIT 512KB FLASH 64LQFP", Case/Package=LQFP, Frequency=216MHz, Max Operating Temperature=85°C, Min Operating Temperature=-40°C, Core Architecture=ARM, Interface=I2C, Memory Size=512KB, Memory Type=FLASH, Mount="Surface Mount", Number of I/Os=50, Oscillator Type=Internal, Packaging=Tray, Peripherals="Brown-out Detect/Reset"
U2: library part CMP-2000-05076-3, "SENSOR PRESSURE ABS", Case/Package=SMD/SMT, Max Operating Temperature=85°C, Min Operating Temperature=-40°C, Operating Pressure=15.95PSI, Lead Free="Lead Free", Max Pressure=290.08PSI, Number of Pins=8, Output Type=SPI, Port Style="No Port", Pressure Type=Absolute, Termination=SMD/SMT
U3: library part CMP-2000-07589-1, "High Performance 6-Axis MEMS MotionTracking(TM) Device, 1.71 to 3.45 V, -40 to 85 degC, 16-Pin LGA, RoHS", Manufacturer=InvenSense, Max Operating Temperature=85degC, Min Operating Temperature=-40degC, Package Description="16-Pin Land Grid Array, Body 3 x 3 mm, Pitch 0.5 mm", Package Reference=I62-16, Datasheet URL=http://www.invensense.com/wp-content/uploads/2016/10/DS-000176-ICM-20602-v1.0.pdf, Datasheet Version="Rev. 1.0, 10/2016", Manufacturer URL=http://www.invensense.com/, Mounting Technology=SurfaceMount, Output Type=I2C, RoHSCompliant=True, Sensor Type=Temperature
U4: library part CMP-2000-07604-2, "IC REG LINEAR 3.3V 300MA SOT23-5", Case/Package=SOT-23-5, Dropout Voltage=380mV, Max Input Voltage=5.5V, Max Operating Temperature=125°C, Max Output Current=300mA, Min Input Voltage=2.5V, Min Operating Temperature=-40°C, Nominal Output Voltage=3.3V, Operating Supply Current=42uA, Power Supply Rejection Ratio (PSRR)=60dB, Quiescent Current=38uA, Accuracy=3%, Height=1.1mm, Length=2.9mm, Mount="Surface Mount", Number Of Outputs=1, Number of Pins=5, Output Current=300mA, Output Type=Fixed, Output Voltage=3.3V, Packaging="Tape and Reel", REACH SVHC="No SVHC", Width=1.6mm
Y1: library part CMP-27762-006537-2, "Crystal 16MHz ±20ppm (Tol) ±30ppm (Stability) 18pF FUND 80Ω 4-Pin SMD T/R", Case/Package=CSMD, ESR (Equivalent Series Resistance)=80R, Frequency=16MHz, Frequency Stability=30ppm, Frequency Tolerance=20ppm, Load Capacitance=18pF, Max Operating Temperature=85°C, Min Operating Temperature=-40°C, Operating Frequency="16 MHz", Package Quantity=1000, Depth=2.5mm, Height=1mm, Lead Free="Lead Free", Length=3.2mm, Mount="Surface Mount", Number of Pins=4, Packaging="Tape and Reel", Radiation Hardening=No, Series=ABM8G, Series Resistance=80R, Termination=SMD/SMT, Tolerance=20ppm, Width=2.5mm

## Via types
v1: diameter 23.62, hole 9.84, TOP SIGNAL to BOTTOM SIGNAL, 43 vias

## Nets (pads, with @x,y where several pads share a name; then routed paths per layer and width w, separated by ;. In a path a pad name is that pad's centre, name@x,y a point inside that pad or via, vN(x,y) a via of type N, cw(c..) or ccw(c..) an arc to the next point about the centre after c; other vN are vias at no path point)
+5: C18.1 D2.1 J1.1
BOOTLED: *.1 R8.2 R13.1 U1.60 | length 867.2
  TOP SIGNAL w9: U1.60 3641.73,4155.51
  TOP SIGNAL w10: v1(3531.5,4265.75) 3531.5,4263.34 3557.79,4237.05 3557.79,4231.58 3583.66,4205.71 R13.1 ; v1(3970.47,4127.95) 4048.99,4127.95 *.1@4050.71,4129.67
  TOP SIGNAL w12: 3641.73,4155.51 3641.73,4174.21
  TOP SIGNAL w14: R13.1 R8.2 3641.73,4201.77 3641.73,4174.21
  BOTTOM SIGNAL w10: v1(3531.5,4265.75) 3530.16,4264.41 3530.16,4202.44 3592.24,4140.35 3777.68,4140.35 3798.98,4161.65 3909.32,4161.65 3943.02,4127.95 v1(3970.47,4127.95)
CAM_ANALOG: P4.2
ESC_CURRENT_SENSE: J2.8 U1.10 | length 1118.8
  TOP SIGNAL w14: v1(3429.84,3856.16) 3430.04,3855.95 U1.10 ; v1(4360.24,3907.48) 4361.92,3905.79 4361.92,3888.12 4370.12,3879.92 J2.8
  BOTTOM SIGNAL w14: v1(3429.84,3856.16) 3432.45,3856.16 3448.6,3872.31 4047.16,3872.31 4085.19,3834.28 4257.33,3834.28 4290.45,3867.39 4320.15,3867.39 v1(4360.24,3907.48)
GND: C1.2 C2.2 C3.2 C4.2 C5.2 C6.2 C7.2 C8.2 C9.2 C10.2 C11.2 C12.2 C13.1 C14.2 C15.2 C16.2 C17.2 C18.2 D1.1 D3.1 D4.1 D5.1 J1.5 J2.1 J4.2 J5.2 J?.5 LS1.2 P1.3 P2.3 P3.3 P4.3 R8.1 R10.1 U1.12 U1.18 U1.31 U1.47 U1.63 U2.1 U2.2 U2.5 U2.7 U3.8 U3.13 U4.2 Y1.2 Y1.4 | length 4043
  TOP SIGNAL w9: 3540.84,4100.38 3542.34,4098.88 3542.34,4071.94 3554.44,4059.84 3580.51,4059.84 3582.68,4062.01 U1.63 ; 3580.36,3614.17 3582.68,3616.49 U1.18 ; U1.31 3839.55,3662.38 3839.55,3708.31 3844.82,3713.58 3864.36,3713.58 3879.43,3698.51 ; U1.47 3935.22,4013.96 3967.87,4013.96 3968.87,4012.96 3972.27,4012.96 3981.3,4003.94
  TOP SIGNAL w10: 3442.27,3816.58 U1.12 ; R8.1 3640.75,4266.73 3652.48,4278.46 3652.48,4287.87 3663.08,4298.46 3748.39,4298.46 3767.72,4317.8 U3.8
  TOP SIGNAL w12: 3423.23,3797.54 3442.27,3816.58 ; 3463.58,4179.13 3540.84,4101.88 3540.84,4100.38 ; 3880.42,3698.51 3880.42,3648.12 3935.62,3592.92 ; 3981.3,4003.94 3982.28,4003.94
  TOP SIGNAL w14: v1(3021.65,3122.49) 3022.64,3123.47 3022.64,3168.31 R10.1 ; v1(3029.67,3901.4) 3051.01,3901.4 J?.5 ; C10.2 3149.34,4164.68 3149.34,4163.23 3159.3,4153.28 3266.02,4153.28 C3.2 ; Y1.4 3291.34,3836.61 3309.06,3818.9 3316.51,3818.9 3339.42,3795.99 3343.77,3795.99 Y1.2@3370.08,3769.68 ; C1.2 3353.46,3744.2 3353.46,3753.06 Y1.2@3370.08,3769.68 ; v1(3366.14,4155.95) 3366.14,4153.35 3382.87,4136.62 C4.2 ; v1(3370.08,4267.72) P4.3 3374.89,4339.68 3374.89,4301.33 C8.2 3463.62,4179.17 ; v1(3375.98,3703.2) 3375.98,3767.72 Y1.2 ; 3423.23,3797.54 3412,3786.31 3390.64,3786.31 Y1.2 ; v1(3513.78,3622.05) 3513.78,3619.44 3510.87,3616.53 C5.2 3522.57,3574.69 3526.96,3574.69 3535.17,3582.89 3535.17,3588.73 3545.12,3598.69 3572.16,3598.69 3580.36,3606.89 3580.36,3614.17 ; v1(3541.47,4400.85) 3543.31,4402.7 3557.22,4402.7 3583.66,4429.13 D4.1 ; C15.2 3728.91,4495.78 3767.15,4495.78 C11.2 ; C11.2@3770.02,4497.81 3815.59,4497.81 v1(3817.06,4499.28) ; 3784.06,4493.68 3804.13,4473.61 3804.13,4444.84 3803.03,4443.74 U3.13@3803.03,4419 ; v1(3789.37,3425.2) C9.2 ; D3.1 3838.58,3210.63 v1(3838.58,3152.01) ; C14.2@3854.19,4416.34 C14.2 3884.63,4416.2 3887.33,4413.5 3913.28,4413.5 U2.7 U2.2 ; C12.2@3854.33,4348.43 3878.8,4323.96 3893.96,4323.96 v1(3895.8,4322.11) ; C12.2@3854.33,4349.63 3856.63,4351.93 3872.27,4351.93 3882.54,4362.2 U2.5 3913.5,4362.32 3928.68,4362.32 3944.09,4377.72 3944.09,4396.28 3961.08,4413.28 ; 3935.62,3592.92 3935.62,3574.69 C6.2 3956.52,3553.79 3956.52,3519.7 v1(3958.36,3517.86) ; U2.1 U2.2 ; 3982.28,4003.94 4012.83,4003.94 C7.2 4026.66,4004.06 4063.12,4004.06 v1(4064.96,4005.91) ; v1(4014.87,4407.35) 4012.26,4407.35 4006.23,4413.39 U2.2 ; v1(4033.6,4331.96) 4105.43,4331.96 4110.24,4336.77 P3.3 ; v1(4114.17,3503.94) 4114.17,3506.54 4127.08,3519.45 4127.08,3537.51 4139.76,3550.2 D5.1@4143.7,3550.2 ; v1(4133.86,3375.98) 4134.84,3376.97 4187.99,3376.97 C16.2 4208.66,3397.64 U4.2 4257.96,3403.63 4277.28,3403.63 4302.2,3428.56 C17.2 ; D5.1@4141.73,3552.17 D5.1@4143.7,3550.2 ; v1(4273.15,3472.88) 4275.09,3472.88 C17.2 ; v1(4311.02,3838.58) 4311.02,3787.4 D1.1 ; v1(4338.71,4223.69) 4339.07,4224.05 4416.96,4224.05 J2.1 ; v1(4397.77,3268.96) 4399.31,3268.96 4480.74,3350.39 P1.3 4482.28,3340.55 P1.3@4478.35,3336.61 ; v1(4400.75,3564.13) 4400.75,3599.57 P2.3 ; Y1.2@3370.08,3769.68 Y1.2 ; 3463.58,4179.13 3463.62,4179.17 ; D5.1@4143.7,3550.2 4193.9,3500 C17.2
  TOP SIGNAL w19.68: C3.2 3286.22,4133.07 3346.22,4133.07 C4.2
  TOP SIGNAL w20: D3.1@3836.61,3215.55 3863.61,3242.54 3947.27,3242.54 J4.2
IMU_INT: U1.61 U3.6 | length 343.4
  TOP SIGNAL w9: v1(3603.35,4167.17) 3622.05,4148.46 U1.61 ; v1(3651.84,4322.81) 3655.8,4322.81 3660.43,4318.18 3719.75,4318.18 3728.35,4326.77 U3.6
  BOTTOM SIGNAL w9: v1(3603.35,4167.17) 3603.86,4167.17 3621.5,4184.81 3641.5,4184.81 3659.45,4202.76 3659.45,4293 3654.64,4297.8 3654.64,4320.01 v1(3651.84,4322.81)
M1_PWM: J2.3 J?.2@4237.2,3882.87 U1.41 | length 974.7
  TOP SIGNAL w10: U1.41 4079.77,3895.32 4085.63,3889.47 4085.63,3842.47 4091.49,3836.61 4108.1,3836.61 4108.43,3836.28 4190.61,3836.28 4237.2,3882.87 4306.1,3882.87 4354.87,3834.11 4464.87,3834.11 4484.79,3854.03 4484.79,4101.16 4459.96,4125.98 J2.3
M2_PWM: J2.4 J?.4@4137.2,3882.87 U1.42 | length 958.2
  TOP SIGNAL w9: U1.42 3981.92,3915.01 3982.08,3915.17 4104.91,3915.17 4137.2,3882.87 4147.49,3893.16 4182.3,3893.16 4225.92,3936.78 4279.77,3936.78 4358.47,3858.08 4373.38,3858.08 4377.85,3853.61 4456.79,3853.61 4465.29,3862.1 4465.29,4045.38 4456.79,4053.87 4377.85,4053.87 4376.85,4052.87 4376.26,4052.87 4365.09,4064.04 4365.09,4071.5 4370.36,4076.77 J2.4
M3_PWM: J2.5 J?.3@4137.2,3982.87 U1.44 | length 514.1
  TOP SIGNAL w9: U1.44 3980.94,3954.38 3981.1,3954.54 4101.77,3954.54 4130.1,3982.87 4137.2,3982.87 4183.3,4028.97 4415.91,4028.97 J2.5
M4_PWM: J2.6 J?.1@4237.2,3982.87 U1.43 | length 504.5
  TOP SIGNAL w10: U1.43 4189.02,3934.69 4237.2,3982.87 4412.8,3982.87 J2.6
MBUS: P3.1 U1.52 | length 606.1
  TOP SIGNAL w10: U1.52 3799.21,4070.27 3799.21,4062.01 3806.1,4055.12
  TOP SIGNAL w12: 3806.1,4055.12 3864.22,4055.12 3880.42,4071.32 3880.42,4078.11 4022.78,4220.47 4145.18,4220.47 4188.98,4264.27 P3.1
MCU_BUZZER: LS1.1 U1.36 | length 781.8
  TOP SIGNAL w10: 3895.41,3796.9 3884.49,3785.97 3884.49,3729.08 3896.88,3716.69 4328.04,3716.69 4366.14,3754.8 v1(4366.14,3803.15)
  BOTTOM SIGNAL w10: LS1.1 4312.99,3712.6 4371.73,3771.34 4371.73,3781.34 4368.75,3784.32 4368.75,3800.54 v1(4366.14,3803.15)
MCU_LED: R6.1 U1.35 | length 164.7
  TOP SIGNAL w10: U1.35 4096.11,3777.21 R6.1
MCU_NRST: C10.1 J?.3@3052.36,3952.76 R7.1 U1.7 | length 1141.8
  TOP SIGNAL w9: v1(3427.17,3905.51) 3434.21,3905.51 3443.71,3915.01 U1.7
  TOP SIGNAL w10: v1(3010.83,3949.8) 3014.51,3949.8 3017.47,3952.76 J?.3@3052.36,3952.76
  TOP SIGNAL w14: C10.1 R7.1 3185.53,4247.54 3226.87,4247.54 v1(3227.36,4247.05)
  BOTTOM SIGNAL w9: v1(3227.36,4247.05) 3135.06,4154.75 3116.86,4136.55 3116.86,3944.35 3155.7,3905.51 v1(3427.17,3905.51)
  BOTTOM SIGNAL w10: v1(3010.83,3949.8) 3010.83,4035.02 3130.55,4154.75 3135.06,4154.75
MCU_SWCLK: J?.4@3102.36,3952.76 U1.49 | length 990.2
  TOP SIGNAL w10: J?.4@3102.36,3952.76 v1(3163.39,3952.76) ; 3867.13,4116.14 3877.44,4116.14 3896.14,4134.84 v1(3896.65,4134.84)
  BOTTOM SIGNAL w10: v1(3163.39,3952.76) 3159.7,3952.76 3145.65,3966.8 3143.43,3966.8 3136.36,3973.87 3136.36,4023.67 3142.22,4029.53 3791.34,4029.53 v1(3896.65,4134.84)
MCU_SWDIO: J?.2@3102.36,4002.76 U1.46 | length 1056.7
  TOP SIGNAL w10: J?.2@3102.36,4002.76 3162.04,4002.76 v1(3163.17,4001.63) ; U1.46 3890.7,3993.75 3884.49,3999.96 3884.49,4041.88 3905.55,4062.94 3923.18,4062.94 v1(3946.85,4086.61)
  BOTTOM SIGNAL w10: v1(3163.17,4001.63) 3164.3,4000.5 3860.73,4000.5 v1(3946.85,4086.61)
MCU_SWO: J?.6 U1.55 | length 1298.3
  TOP SIGNAL w10: J?.6 3102.95,3902.17 3152.68,3902.17 3190.2,3939.68 3190.2,3989.18 3189.98,3989.39 3189.98,4065.42 3091.34,4164.06 3091.34,4272.98 3101.07,4282.72 3299.54,4282.72 3541.91,4040.34 3690.55,4040.34 3691.52,4039.37 3734.3,4039.37 3740.16,4045.23 U1.55
MISO: J?.1@3442.13,3379.13 R1.1 U1.22 | length 475.4
  TOP SIGNAL w9: v1(3647.51,3605.01) 3649.3,3605.01 3661.42,3617.13 U1.22
  TOP SIGNAL w12: R1.1 3647.51,3570.73 v1(3647.51,3605.01)
  BOTTOM SIGNAL w12: J?.1@3442.13,3379.13 3487.5,3379.13 3494.53,3386.16 3494.53,3419.15 3502.11,3426.73 3557.03,3426.73 3647.51,3517.2 v1(3647.51,3605.01)
MOSI: J?.3@3542.13,3379.13 R2.1 U1.23 | length 385.6
  TOP SIGNAL w9: U1.23 3681.1,3611.77 3684.47,3608.4 v1(3684.47,3604.45)
  TOP SIGNAL w12: v1(3684.47,3604.45) 3684.47,3573.4 R2.1
  BOTTOM SIGNAL w12: J?.3@3542.13,3379.13 3684.47,3521.48 v1(3684.47,3604.45)
NetC9_1: C9.1 U1.30
NetC11_1: C11.1 U3.14 | length 41.3
  TOP SIGNAL w12: U3.14 C11.1
NetD1_2: D1.2 R6.2 | length 61
  TOP SIGNAL w14: R6.2 D1.2
NetD3_2: D3.2 R12.2 | length 94.5
  TOP SIGNAL w14: D3.2 3738.19,3215.55 3785.54,3262.91 3785.54,3273.73 R12.2
NetD4_2: D4.2 R13.2 | length 64
  TOP SIGNAL w14: R13.2 D4.2
NetD5_2: D5.2 R14.2 | length 61
  TOP SIGNAL w15: D5.2 R14.2
NetR3_1: R3.1 U1.6 | length 105.6
  TOP SIGNAL w10: 3434.4,3934.69 U1.6
  TOP SIGNAL w12: 3421.73,3942.4 3429.43,3934.69 3434.4,3934.69
  TOP SIGNAL w14: R3.1@3392.72,3956.69 3392.72,3952.13 3402.45,3942.4 3421.73,3942.4
NetR10_2: R10.2 R11.1 | length 81.7
  TOP SIGNAL w20: R10.2 R11.1
OSC_IN: C1.1 U1.5 Y1.1 | length 536.5
  TOP SIGNAL w9: 3438.98,3957.68 3442.27,3954.38 U1.5
  TOP SIGNAL w12: C1.1 Y1.1@3283.66,3765.94 ; Y1.1 3283.46,3769.68 3256.16,3796.99 3253.22,3796.99 3243.84,3806.36 3243.84,3866.86 3255.92,3878.94 3291.2,3878.94 3298.23,3885.97 3298.23,3978.34 3308.33,3988.44 3416.08,3988.44 3432.09,3972.43 3432.09,3964.57 3438.98,3957.68
OSC_OUT: C2.1 R3.2 Y1.3 | length 142.9
  TOP SIGNAL w14: R3.2@3331.69,3959.65 3331.69,3912.01 C2.1 3346.06,3860.63 3370.08,3836.61 Y1.3
SCK: J?.2@3442.13,3479.13 U1.21 | length 463
  TOP SIGNAL w9: U1.21 3641.73,3705.26 3642.55,3706.08 3642.55,3723.06
  TOP SIGNAL w12: J?.2@3442.13,3479.13 3442.13,3632.04 3545.15,3735.07 3630.54,3735.07 3642.55,3723.06
SCL: J?.1@3843.7,4240.16 R4.1 U1.58 U2.4 U3.2 | length 522.1
  TOP SIGNAL w6: 3663.07,4372.94 3686.1,4395.97 3699.12,4395.97 U3.2
  TOP SIGNAL w9: U1.58 3681.1,4139.99 3681.23,4140.12 3681.23,4148.25 3693.42,4160.43 3729.33,4160.43
  TOP SIGNAL w10: J?.1@3843.7,4240.16 3872.56,4269.02 3903.46,4269.02 3923.46,4289.02 3960.28,4289.02 3976.38,4305.12 U2.4
  TOP SIGNAL w12: 3729.33,4160.43 3740.65,4171.75 R4.1@3740.65,4205.22
  TOP SIGNAL w14: R4.1@3740.65,4205.22 R4.1 3809.25,4205.71 J?.1@3843.7,4240.16
  other v1: 3642,4363
SD_CS: J?.4@3542.13,3479.13 U1.20 | length 417
  TOP SIGNAL w9: 3621.43,3713.07 3622.05,3712.45 U1.20
  TOP SIGNAL w12: J?.4@3542.13,3479.13 3534.7,3479.13 3476.17,3537.66 3476.17,3634.97 3554.26,3713.07 3621.43,3713.07
SDA: J?.2@3943.7,4240.16 R5.1 U1.59 U2.3 U3.3 | length 628.7
  TOP SIGNAL w9: U1.59 3661.42,4146.21 3662.23,4147.02 3662.23,4161.99 3678.15,4177.9 v1(3678.15,4181.86)
  TOP SIGNAL w12: 3671,4353 3671,4354 3693.97,4376.97 U3.3 ; v1(3678.15,4181.86) 3678.15,4194.98 3688.88,4205.71 R5.1 ; v1@3780.51,4181.1 3884.65,4181.1 3943.7,4240.16 4002.22,4298.68 4002.22,4375.72 3991.04,4386.91 3977.27,4386.91 U2.3
  BOTTOM SIGNAL w12: v1(3678.15,4181.86) 3678.26,4181.97 3781.38,4181.97 v1(3781.5,4182.09)
SERVO_1: J?.1@4322.83,3155.91 P1.1 U1.37 | length 1198
  TOP SIGNAL w9: U1.37 3966.08,3816.58 3966.9,3815.77 3981.48,3815.77 3982.98,3814.27
  TOP SIGNAL w12: 3982.98,3814.27 3991.14,3806.1
  TOP SIGNAL w16: 3991.14,3806.1 v1(4030.2,3806.1)
  TOP SIGNAL w20: J?.1@4322.83,3155.91 4359.84,3192.91 P1.1
  BOTTOM SIGNAL w20: v1(4030.2,3806.1) 4029.5,3805.41 4029.5,3771.34 4012.45,3754.29 4012.45,3681.34 4263.87,3429.93 4332.61,3429.93 4358.58,3403.95 4358.58,3336.2 4332.14,3309.76 4300.53,3309.76 4263.87,3273.1 4263.87,3214.87 J?.1@4322.83,3155.91
SERVO_2: J?.2@4322.83,3255.91 P2.1 U1.38 | length 1230.7
  TOP SIGNAL w9: U1.38 3981.04,3836.27
  TOP SIGNAL w12: 3981.04,3836.27 3988.28,3843.5
  TOP SIGNAL w16: 3988.28,3843.5 v1(4030.51,3843.5)
  TOP SIGNAL w20: J?.2@4322.83,3255.91 4401.56,3334.63 4401.56,3442.9 4484.25,3525.59 P2.1
  BOTTOM SIGNAL w20: v1(4030.51,3843.5) 4031.49,3843.5 4037.08,3837.91 4043.37,3837.91 4062.01,3819.28 4062.01,3699.99 4203.81,3558.18 4246.78,3558.18 4388.58,3416.38 4388.58,3321.65 J?.2@4322.83,3255.91
USB_D_N: J1.2 U1.29
USB_D_P: J1.3 U1.33
V_MON: R9.2 R11.2 U1.15 | length 799.2
  TOP SIGNAL w12: 3434.06,3756.89 3434.69,3757.53 U1.15
  TOP SIGNAL w15: 3424.21,3720.47 3424.21,3747.05 3434.06,3756.89
  TOP SIGNAL w20: R9.2 3223.92,3131.4 3223.92,3238.68 R11.2 3229.33,3244.09 3283.56,3244.09 3295.28,3255.81 3295.28,3287.4 3390.53,3382.66 3390.53,3500.51 3407.48,3517.45 3407.48,3703.74 3424.21,3720.47
VCC: C16.1 D2.2 J4.1 J5.1 J?.1@4047.24,3425.2 P1.2 P2.2 P3.2 R9.1 R12.1 U4.1 | length 2702.5
  TOP SIGNAL w15: C16.1 C16.1@4190.43,3436.5 ; U4.1@4250.51,3436.5 U4.1
  TOP SIGNAL w19.68: P2.2 P2.2@4486.72,3606.3
  TOP SIGNAL w20: J5.1@3649.61,3283.46 R12.1
  TOP SIGNAL w30: C16.1@4190.43,3436.5 U4.1@4250.51,3436.5
  TOP SIGNAL w39.37: D2.2 3262.8,3382.87 3171.1,3291.18 3171.1,3203.92 3148.62,3181.44 3148.62,3130.91 R9.1 3148.62,3128.94 3148.62,3112.55 3189.48,3071.69 3437.83,3071.69 J5.1 ; J5.1@3649.61,3283.46 3712.6,3346.46 3833.46,3346.46 3912.2,3425.2 4047.24,3425.2 4140.16,3425.2 4152.91,3437.95 C16.1 ; 4114.17,3061.02 4443.56,3061.02 4557.09,3174.55 4557.09,3290.78 ; P1.2 4484.54,3269.39 4499.73,3269.39 4501.41,3267.72 4534.02,3267.72 4557.09,3290.78 ; P2.2 4488.48,3604.04 4534.02,3604.04 4557.09,3580.98 4557.09,3290.78
VDD: *.2 C3.1 C4.1 C5.1 C6.1 C7.1 C8.1 C14.1 C15.1 C17.1 J2.2 J?.1@3052.36,4002.76 J?.2@4047.24,3525.2 P4.1 R1.2 R2.2 R4.2 R5.2 R7.2 R14.1 U1.1 U1.13 U1.19 U1.32 U1.48 U1.64 U2.8 U3.16 U4.5 | length 6564.2
  TOP SIGNAL w9: 3438.34,4033.12 U1.1
  TOP SIGNAL w10: U1.64 3562.99,4158.46 ; 3602.36,3591.54 U1.19 ; U1.32 3858.27,3631.89 3881.89,3608.27 ; U1.48 3935.04,4033.46 3977.36,4033.46
  TOP SIGNAL w11.81: 3437.99,4033.46 3438.34,4033.12
  TOP SIGNAL w12: 3500,4432 3535,4432 3544,4441 3544,4467 3546,4469 ; 3594.49,3583.66 3602.36,3591.54 ; C15.1 3728.35,4465.77 3725.05,4469.07 3712.42,4469.07 3703.05,4478.45 3703.05,4495.22 3703.05,4511.99 3718.15,4527.09 3839.91,4527.09 3846,4521 ; 3881.89,3608.27 3895.67,3594.49 ; 3977.36,4033.46 3999.02,4055.12
  TOP SIGNAL w14: 3018.31,4001.97 3019.09,4002.76 3032.33,4002.76 J?.1@3052.36,4002.76 ; R5.2 R4.2@3744.09,4266.73 ; U3.16 C15.1 ; C6.1 3895.67,3571.34 3895.67,3594.49 ; 3999.02,4055.12 4017.72,4055.12 C7.1 ; U4.5 U4.5@4358.27,3438.98 ; C17.1@4358.27,3496.06 C17.1
  TOP SIGNAL w15: 3031.5,4202.76 3031.5,4244.96 3091.75,4305.22 3173.33,4305.22 3188.98,4320.87 3208.66,4320.87 ; 3414.37,4033.46 3437.99,4033.46 ; P4.1 3448.82,4419.03 3461.79,4432 3500,4432 ; 3532.32,4189.13 3562.99,4158.46 ; 3546,4469 3572.22,4495.22 3703.05,4495.22 ; C5.1 3582.07,3574.19 3585.02,3574.19 3594.49,3583.66 ; R4.2@3744.09,4266.73 3777.81,4266.73 3829.03,4317.95 3829.03,4330.38 3827.53,4331.88 3827.53,4433.59 3837.78,4443.84 ; 3846,4521 3846.37,4520.63 3846.37,4481.93 3837.78,4473.34 3837.78,4443.84 ; U2.8 3912.78,4439.59 3895.89,4439.59 3889.47,4446.01 C14.1 3854.33,4445.64 3852.53,4443.84 3837.78,4443.84 ; U2.8@3915.12,4438.98 3915.73,4439.59 3915.73,4455.38 3926.33,4465.98
  TOP SIGNAL w19.68: 3018.31,4001.97 3018.23,4001.97 2979.17,3962.91 2979.17,3855.3 3021.06,3813.41 3133.66,3813.41 3232.28,3912.03 3232.28,4015.75 3253.94,4037.4 C3.1 3276.57,4036.42 C4.1 ; C5.1 3607.56,3526.3 3616.42,3526.3 3638.78,3503.94 R1.2 R2.2 3697.01,3499.84 3850.74,3499.84 3877.95,3527.06 3877.95,3542.6 3878.46,3543.11 3878.46,3554.13 C6.1 ; J2.2 4419.29,4173.23 4488.19,4173.23 4509.63,4151.79 4509.63,3858.15 4521.16,3846.61 4612.55,3846.61 4624.17,3834.99 4624.17,3771.37 4612.64,3759.84 4537.4,3759.84
  TOP SIGNAL w20: 3031.5,4202.76 3031.5,4003.59 3032.33,4002.76 ; 3208.66,4320.87 3326.55,4320.87 3338.27,4332.58 3338.27,4383.28 3349.98,4395 3429.54,4395 3447.01,4377.54 3447.01,4346.3 P4.1 3448.82,4283.98 3471.02,4261.78 3480.13,4261.78 3514.92,4226.99 3514.92,4221.3 C8.1 3532.32,4203.9 3532.32,4189.13 ; C4.1 3385.83,4033.46 3414.37,4033.46 ; 3926.33,4465.98 3997.87,4465.98 4027.15,4436.69 4162.46,4436.69 4254.09,4345.06 4254.09,4192.19 4306.62,4139.67 *.2@4306.62,4129.67 ; C7.1 4121.25,4057.09 4194.08,4129.92 4303.15,4129.92 4350.08,4129.92 4363.86,4143.7 4363.86,4146.08 4377.02,4159.24 4379.72,4159.24 4395.67,4175.2 J2.2
  TOP SIGNAL w28: C6.1 3892.02,3558.29 3892.02,3533.55 3943.53,3482.05 3993.35,3482.05 4036.5,3525.2 4047.24,3525.2 4045.28,3527.17 4045.28,3587.32 4061.68,3603.72 4343.07,3603.72 4359.47,3587.32 ; U4.5@4358.27,3438.98 C17.1@4358.27,3496.06 ; C17.1 R14.1 4362.2,3631.16 4490.89,3759.84 4537.4,3759.84
VDDIO: C12.1 C13.2 U2.6 U3.1 | length 64.6
  TOP SIGNAL w10: C12.1 3854.33,4379.92 3862.2,4387.8 U2.6
  TOP SIGNAL w12: U3.1@3698.91,4417.42 3699.8,4416.53 U3.1
pads on no net: J1.4 J1.6 J1.7 J1.8 J1.9 J1.10 J1.11 J2.7 J2.9 J2.10 J4. J5. J?. P3.MP1 P3.MP2 P4.MP1 P4.MP2 S*1.0 S*2.0 S*3.0 S*4.0 U1.2 U1.3 U1.4 U1.8 U1.9 U1.11 U1.14 U1.16 U1.17 U1.24 U1.25 U1.26 U1.27 U1.28 U1.34 U1.39 U1.40 U1.45 U1.50 U1.51 U1.53 U1.54 U1.56 U1.57 U1.62 U3.4 U3.5 U3.7 U3.9 U3.10 U3.11 U3.12 U3.15 U4.3 U4.4

## Polygon pours and split planes (outlines as drawn)
VDD on POWER "VDD_L02_P002" (solid, pour order 2): 2939.96,4537.4 4631.89,4537.4 4631.89,3772.64 4626.97,3767.72 4404.53,3767.72 4404.53,3354.33 4405.51,3353.35 3339.57,3353.35 3339.57,3688.98 3335.63,3692.91 2947.83,3692.91 2947.83,4529.53 2942.91,4534.45
VCC on POWER "VCC_L02_P003" (solid, pour order 3): 2950.79,3681.1 2951.77,3682.09 3335.63,3682.09 3335.63,3346.46 3331.69,3342.52 4415.35,3342.52 4415.35,3753.94 4413.39,3755.91 4629.92,3755.91 4629.92,2800.2 4625.98,2796.26 2942.91,2796.26 2942.91,3672.24 2951.77,3681.1
VCC on TOP SIGNAL "VCC_L01_P005" (solid, pour order 5): 3533.46,3454.72 4232.28,3454.72 4232.28,2952.76 4222.44,2942.91 3543.31,2942.91 3533.46,2952.76
GND on GND "GND_L03_P000" (solid, pour order 0): 2941.93,4541.34 2944.88,4538.39 4627.95,4538.39 4627.95,2795.28 4625,2798.23 2941.93,2798.23

## Silkscreen, mask and mechanical layers (free items; w line width, h text height)
Top Overlay:
  text "BOOT" at 3543.31,4488.19 h35
  text "CAM" at 3287.4,4397.47 h70 r90
  text "RC" at 4318.9,4397.47 h70 r90
  text "ESC" at 4417.32,4244.09 h70 r90
  text "I2C TEST" at 4010.4,4224.41 h70
  text "TAG / CONN" at 2941.61,4153.54 h70
  text "PWM TEST" at 4379.92,3877.95 h70 r90
  text "MCU" at 4287.4,3708.66 h35
  text "SERV2" at 4415.35,3607.06 h70 r90
  text "PWR TEST" at 3866.14,3358.27 h70
  text "UART / TEST" at 3592.26,3354.33 h70
  text "VCC" at 3818.9,3251.97 h35
  text "SERV1" at 4410.36,3059.06 h70
  text "SERV  / TEST" at 4259.67,2960.63 h70
  text "ESC PWR" at 3856.3,2903.54 h70 r90
  text "BATT IN" at 3316.93,2899.61 h70 r90